# EAGLE board MM-Qwiic-Carrier-2x1-Panel-Panel (EAGLE 9.6.2), part 1 of 3
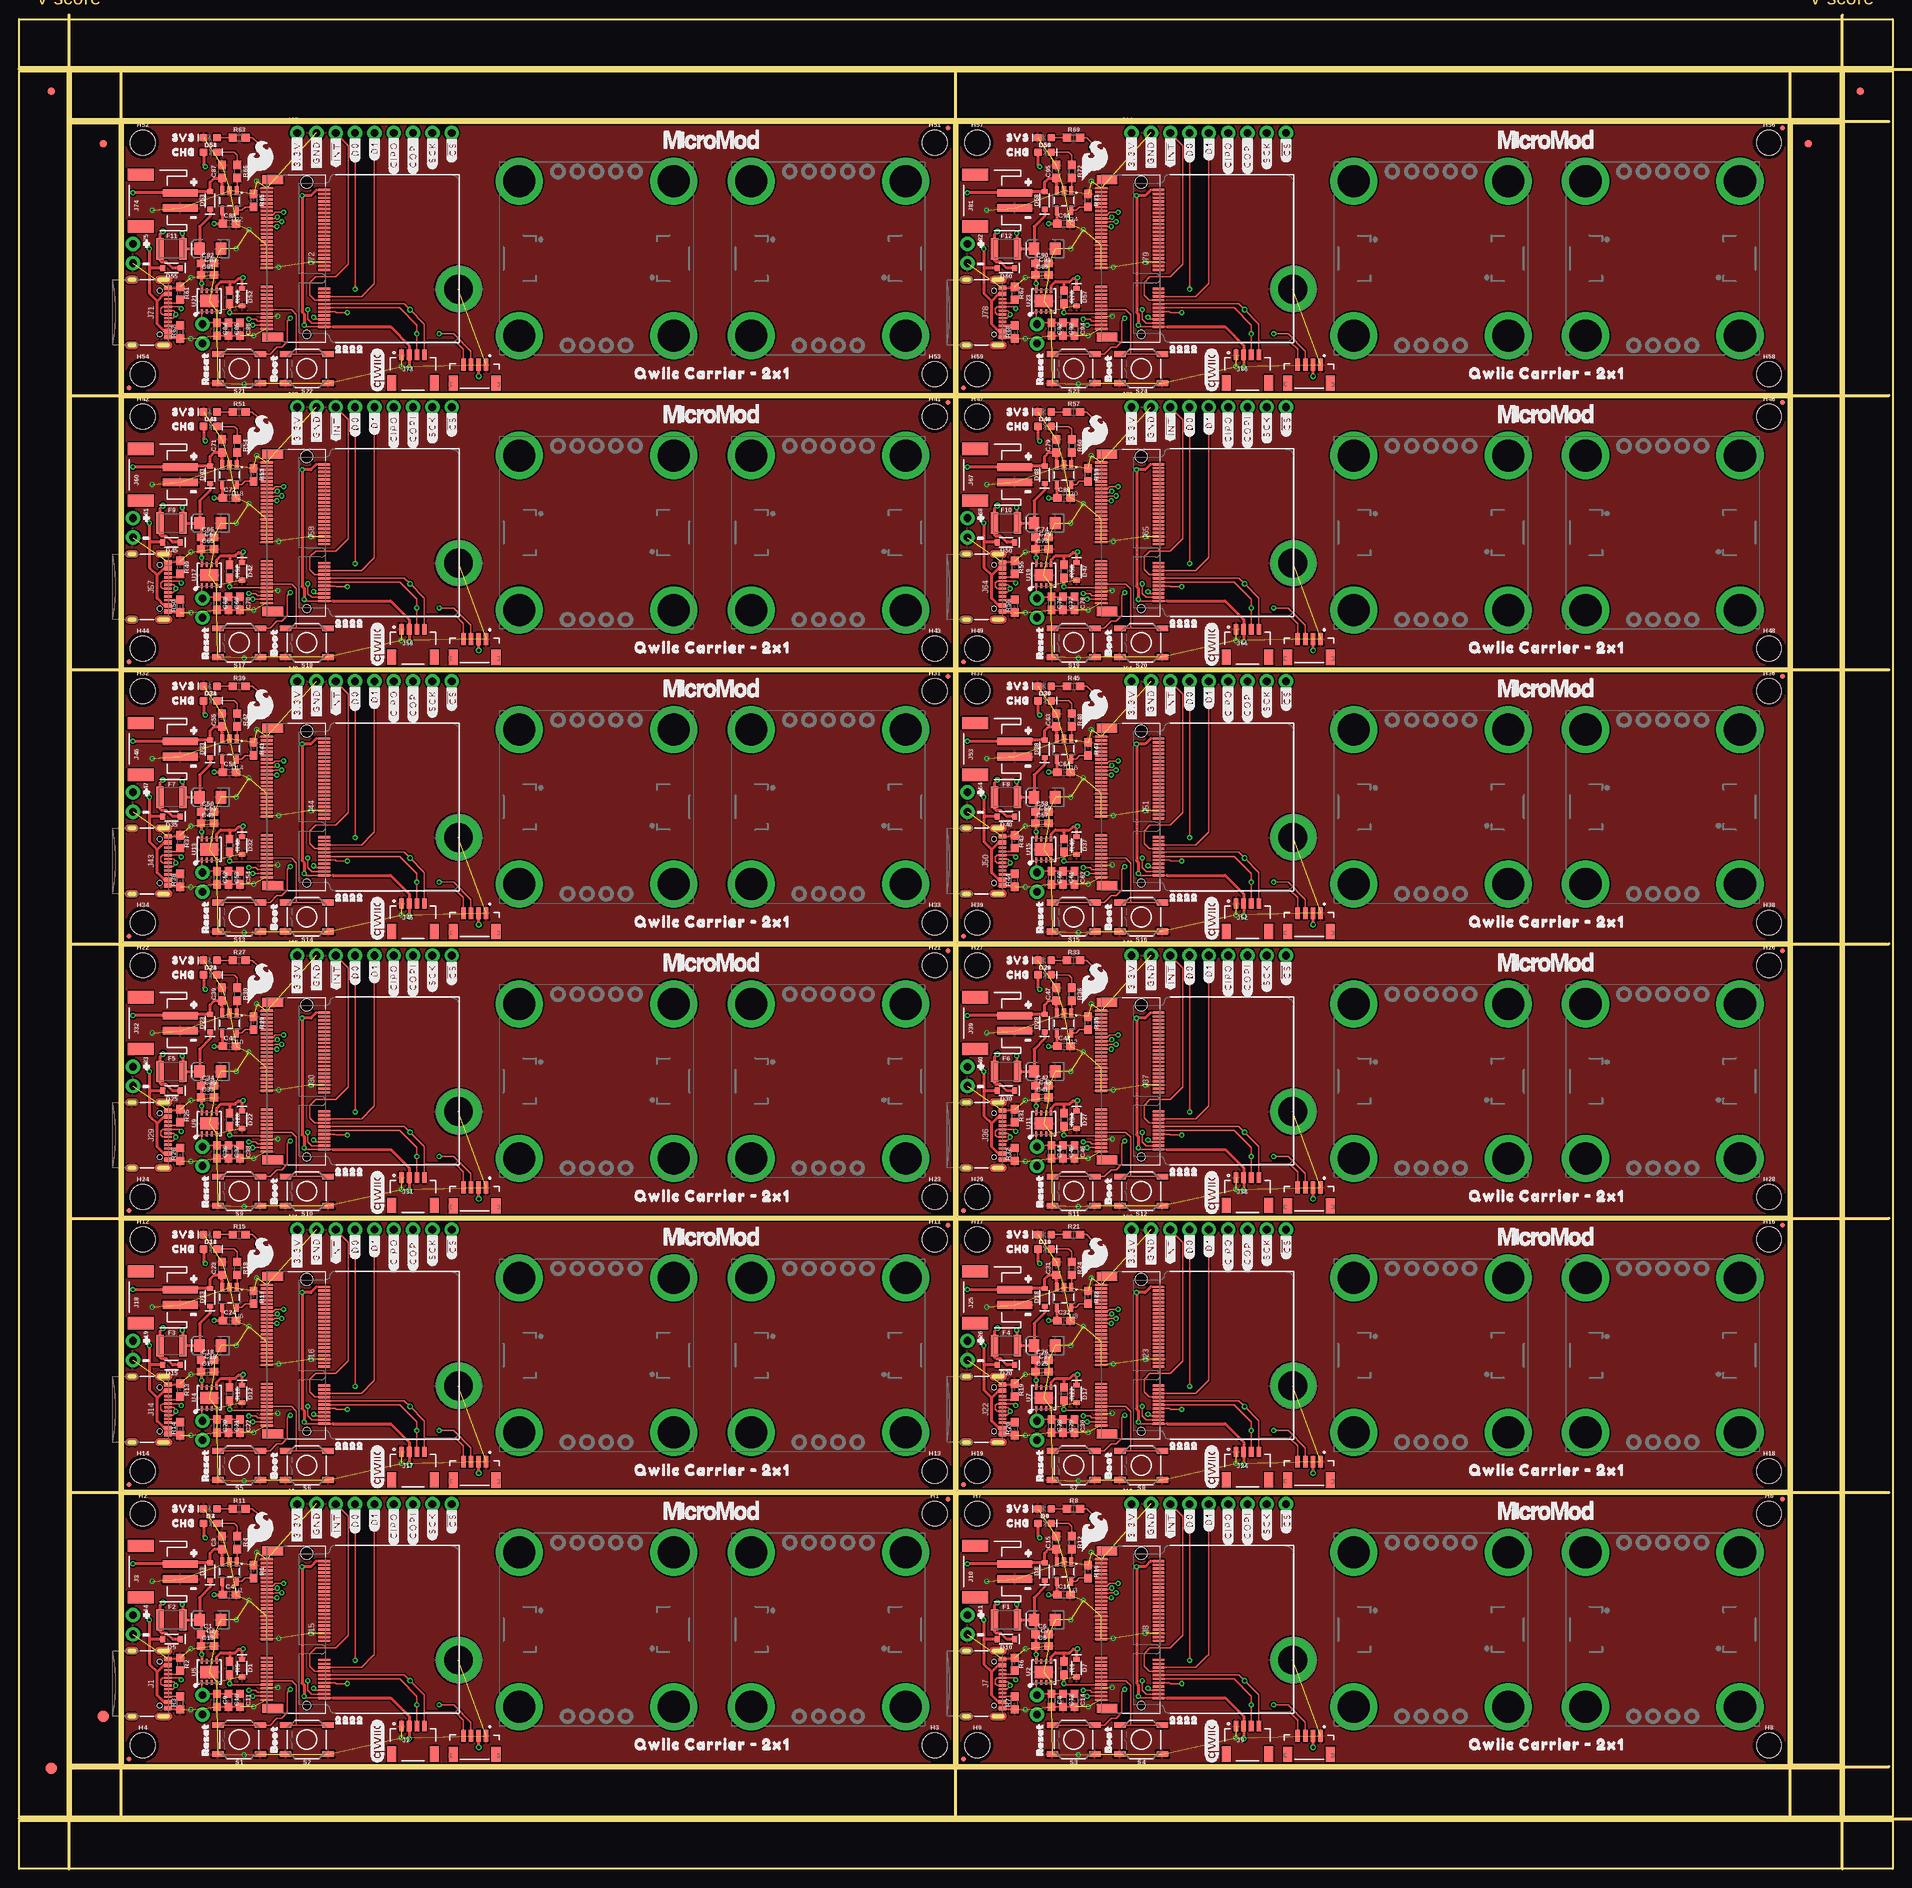
[diagram p0: board, top side]
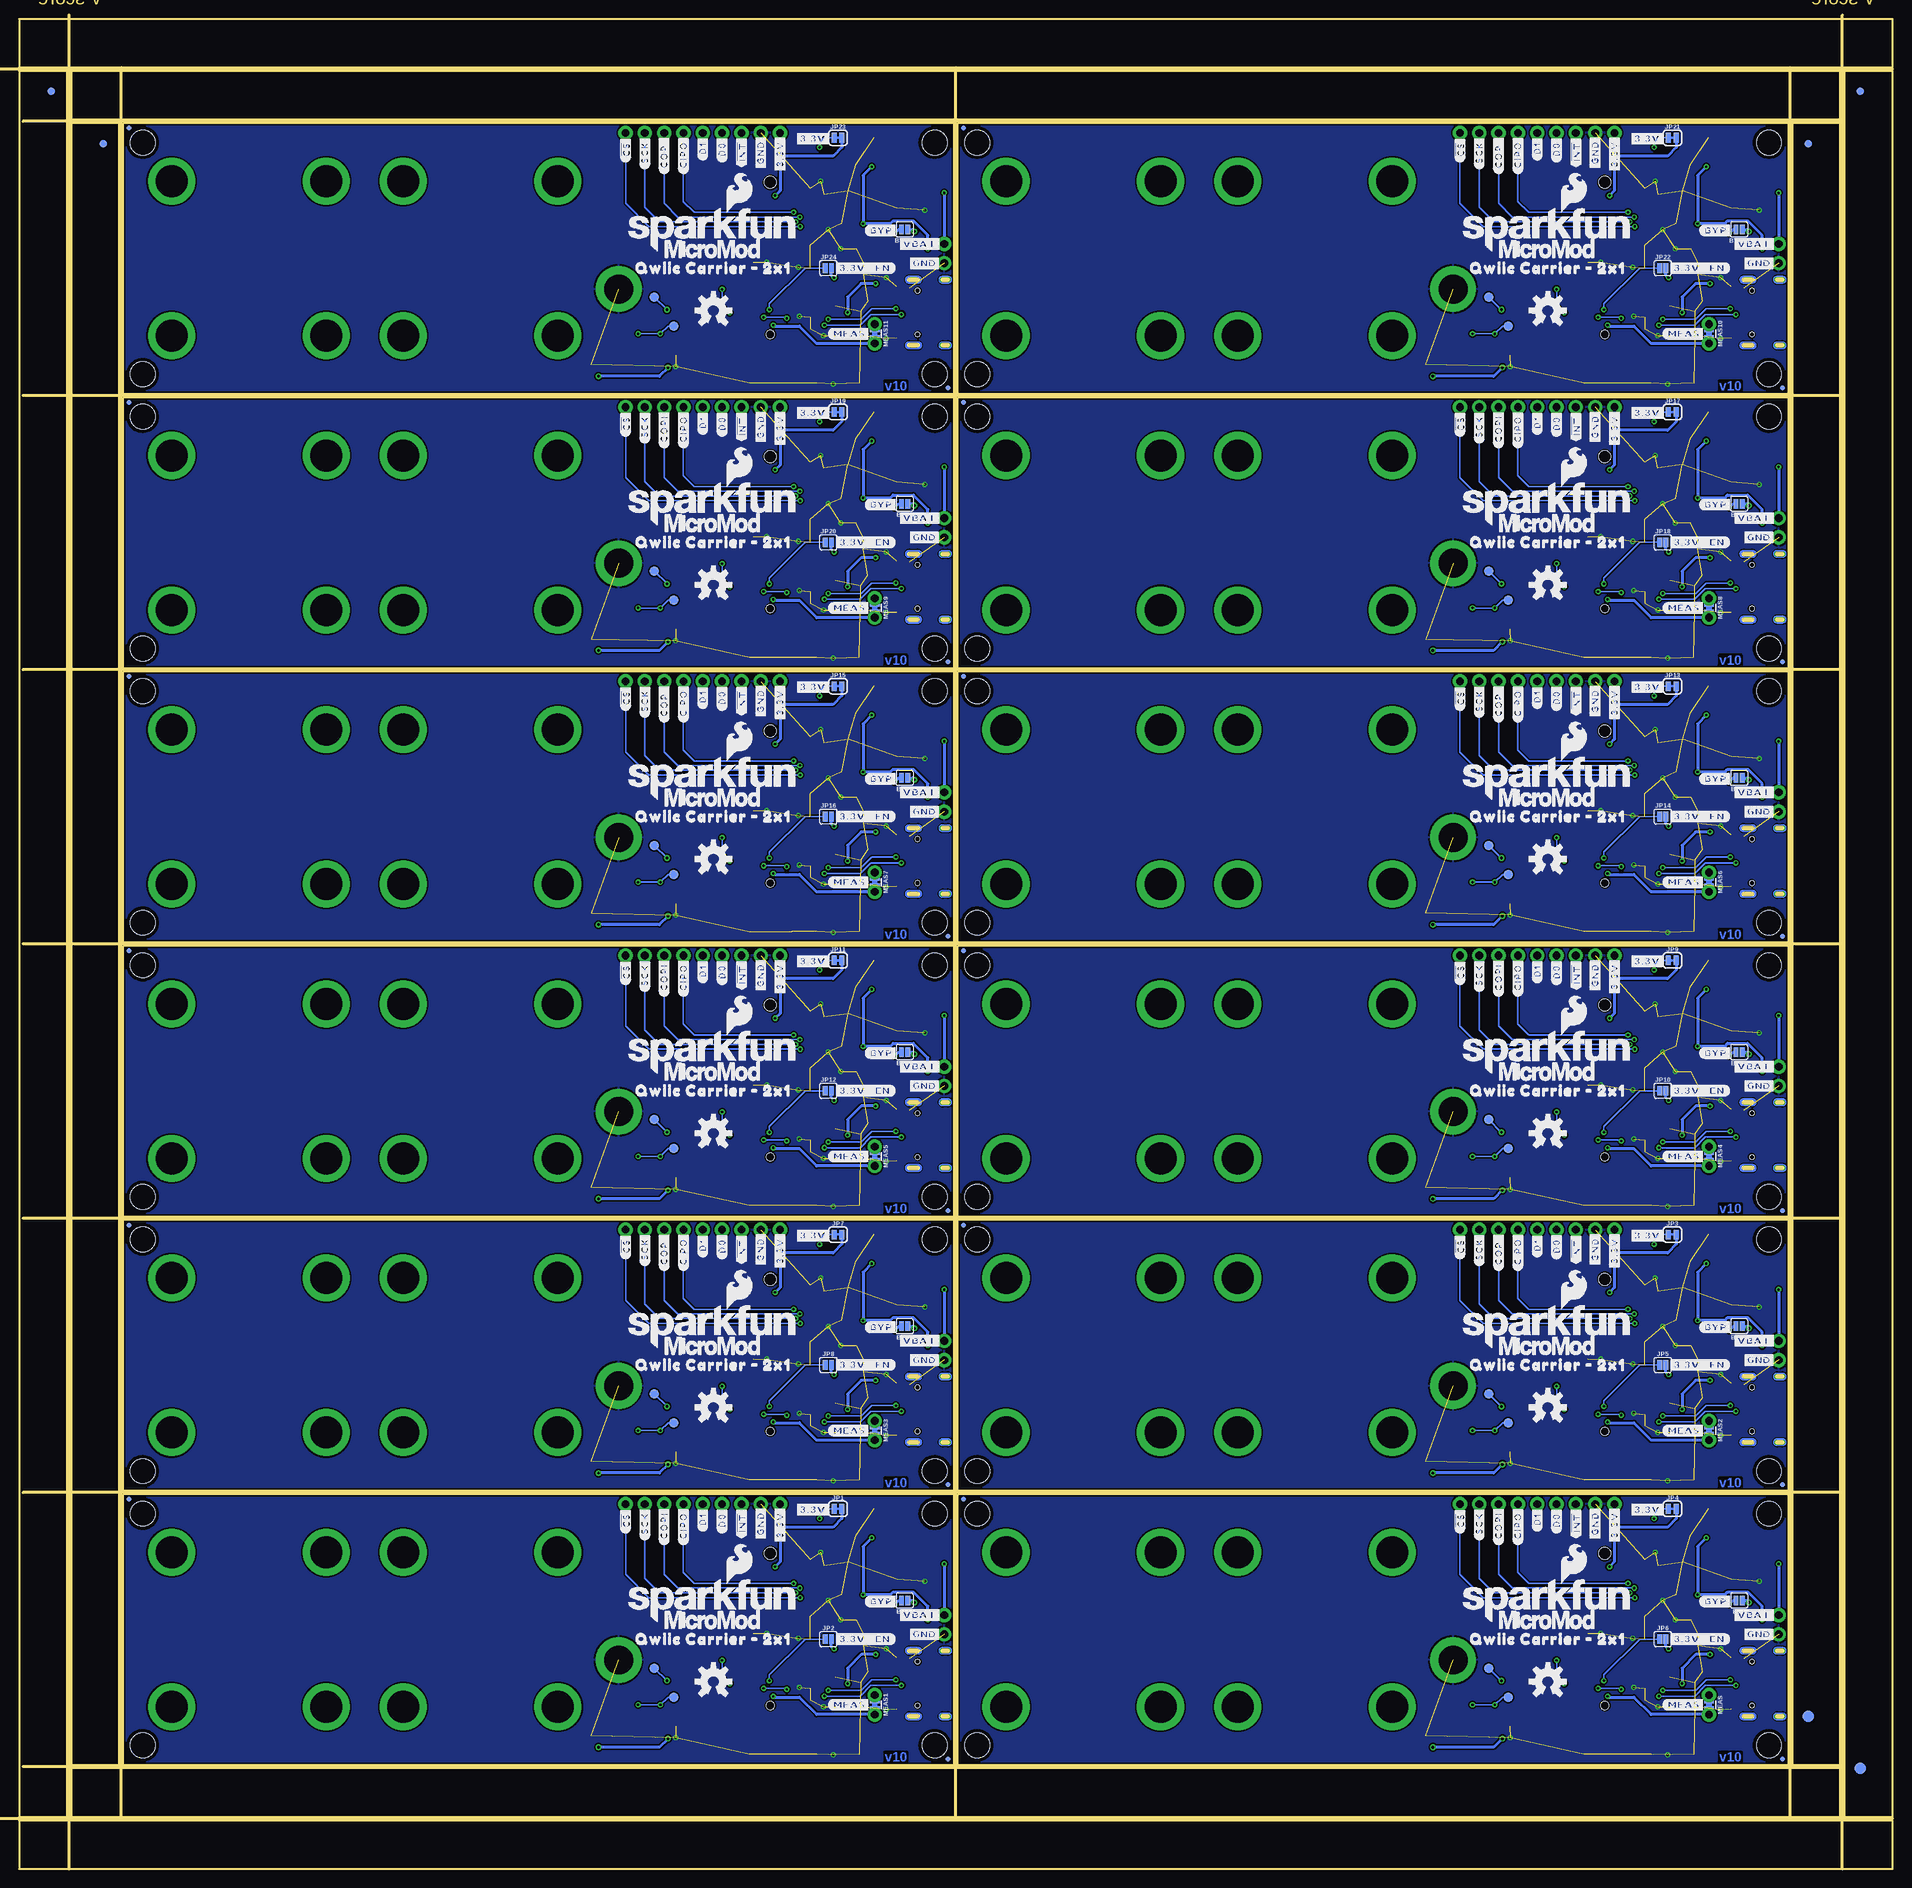
[diagram p1: board, bottom side, seen from below]

Size 246.38 x 243.33 mm. Coordinates in mm from the lower left corner, seen from the top.
Outline: 13.72,13.72 13.72,49.28 122.94,49.28 122.94,13.72 13.72,13.72
Outline: 123.44,13.72 123.44,49.28 232.66,49.28 232.66,13.72 123.44,13.72
Outline: 13.72,49.78 13.72,85.34 122.94,85.34 122.94,49.78 13.72,49.78
Outline: 123.44,49.78 123.44,85.34 232.66,85.34 232.66,49.78 123.44,49.78
Outline: 13.72,85.85 13.72,121.41 122.94,121.41 122.94,85.85 13.72,85.85
Outline: 123.44,85.85 123.44,121.41 232.66,121.41 232.66,85.85 123.44,85.85
Outline: 13.72,121.92 13.72,157.48 122.94,157.48 122.94,121.92 13.72,121.92
Outline: 123.44,121.92 123.44,157.48 232.66,157.48 232.66,121.92 123.44,121.92
Outline: 13.72,157.99 13.72,193.55 122.94,193.55 122.94,157.99 13.72,157.99
Outline: 123.44,157.99 123.44,193.55 232.66,193.55 232.66,157.99 123.44,157.99
Outline: 13.72,194.06 13.72,229.62 122.94,229.62 122.94,194.06 13.72,194.06
Outline: 123.44,194.06 123.44,229.62 232.66,229.62 232.66,194.06 123.44,194.06
Outline: 6.86,13.21 239.52,13.21 239.52,6.86 6.86,6.86 6.86,13.21
Outline: 233.17,229.62 239.52,229.62 239.52,13.72 233.17,13.72 233.17,229.62
Outline: 6.86,236.47 239.52,236.47 239.52,230.12 6.86,230.12 6.86,236.47
Outline: 6.86,229.62 13.21,229.62 13.21,13.72 6.86,13.72 6.86,229.62
Outline: 0,6.35 246.38,6.35 246.38,0 0,0 0,6.35
Outline: 240.03,236.47 246.38,236.47 246.38,6.86 240.03,6.86 240.03,236.47
Outline: 0,243.33 246.38,243.33 246.38,236.98 0,236.98 0,243.33
Outline: 0,236.47 6.35,236.47 6.35,6.86 0,6.86 0,236.47
Copper layers (1*16): Top 0.035mm / dielectric 1.5mm / Bottom 0.035mm
Design rules "MM-Qwiic-Carrier-2x1-Panel": minimum track width 7mil, minimum drill 12mil, track to track 7mil, track to pad 7mil, pad to pad 7mil, via to via 7mil, smd to smd 7mil, copper to edge 7mil, drill to drill 7mil, minimum pad ring 7mil, minimum via ring 7mil, stop-mask expansion 4mil, vias tented up to drill 25mil, thermal gap 10mil
Net classes: 0 default: width 0 mm, drill 0 mm
Milling: 14 lines

## Footprints (pad centres in the part's own frame; a part is rotated, then mirrored left to right if it is on the bottom)
SMT-JUMPER_2_NO_SILK = smd 0.635 x 1.27: 1 -0.406,0; 2 0.406,0
0603 = smd 1.1 x 1: 1 -0.85,0; 2 0.85,0
EIA3216 = smd 1.4 x 1.6: + 1.4,0; - -1.4,0
SOD-323 = smd 0.63 x 0.83: A 1.15,0; C -1.15,0
LED-0603 = smd 1 x 1: A -0.877,0; C 0.877,0
FIDUCIAL-1X2 = smd 1 x 1: 1 0,0
FIDUCIAL-1.5X3 = smd 1.5 x 1.5: 1 0,0
1210 = smd 1 x 2.8: 1 -1.5,0; 2 1.5,0
FIDUCIAL-MICRO = smd 0.635 x 0.635: 1 0,0
STAND-OFF = hole 3.302: 0,0
STAND-OFF-REFLOW-M2.5 = drill 3.8 pad 6: 1 0,0
USB-C-16P-2LAYER-PADS = smd 0.3 x 1: A5 -1.25,-0.34; A6 -0.25,-0.34; A7 0.25,-0.34; A8 1.25,-0.34; B5 1.75,-0.34; B6 0.75,-0.34; B7 -0.75,-0.34; B8 -1.75,-0.34 | smd 0.6 x 1: GND -3.225,-0.34; GND2 3.225,-0.34; VBUS1 -2.45,-0.34; VBUS2 2.45,-0.34 | drill 0.4 pad 0.6 long: SHLD1 -4.318,-0.915; SHLD2 4.318,-0.915; SHLD3 -4.318,-5.095; SHLD4 4.318,-5.095 | hole 0.65: -2.89,-1.445; 2.89,-1.445
JST04_1MM_RA = smd 0.6 x 1.35: 1 -1.5,0; 2 -0.5,0; 3 0.5,0; 4 1.5,0 | smd 1.2 x 2: NC1 2.8,-3.675; NC2 -2.8,-3.675
JST-2-SMD = smd 1 x 4.6: 1 -1,-3.7; 2 1,-3.7 | smd 1.6 x 3.4: NC1 -3.4,1.5; NC2 3.4,1.5
1X02_NO_SILK = drill 1.016 pad 1.88: 1 0,0; 2 2.54,0
JST04_1MM_VERT = smd 0.6 x 1.55: 1 -1.478,0.775; 2 -0.478,0.775; 3 0.522,0.775; 4 1.522,0.775 | smd 1.2 x 2: NC1 -2.778,3.2; NC2 2.822,3.2
1X09_NO_SILK = drill 1.016 pad 1.88: 1 0,0; 2 2.54,0; 3 5.08,0; 4 7.62,0; 5 10.16,0; 6 12.7,0; 7 15.24,0; 8 17.78,0; 9 20.32,0
M.2-CONNECTOR-E = smd 0.3 x 1.55: 1 9.25,-5.275; 2 9,2.275; 3 8.75,-5.275; 4 8.5,2.275; 5 8.25,-5.275; 6 8,2.275; 7 7.75,-5.275; 8 7.5,2.275; 9 7.25,-5.275; 10 7,2.275; 11 6.75,-5.275; 12 6.5,2.275; 13 6.25,-5.275; 14 6,2.275; 15 5.75,-5.275; 16 5.5,2.275; 17 5.25,-5.275; 18 5,2.275; 19 4.75,-5.275; 20 4.5,2.275; 21 4.25,-5.275; 22 4,2.275; 23 3.75,-5.275; 32 1.5,2.275; 33 1.25,-5.275; 34 1,2.275; 35 0.75,-5.275; 36 0.5,2.275; 37 0.25,-5.275; 38 0,2.275; 39 -0.25,-5.275; 40 -0.5,2.275; 41 -0.75,-5.275; 42 -1,2.275; 43 -1.25,-5.275; 44 -1.5,2.275; 45 -1.75,-5.275; 46 -2,2.275; 47 -2.25,-5.275; 48 -2.5,2.275; 49 -2.75,-5.275; 50 -3,2.275; 51 -3.25,-5.275; 52 -3.5,2.275; 53 -3.75,-5.275; 54 -4,2.275; 55 -4.25,-5.275; 56 -4.5,2.275; 57 -4.75,-5.275; 58 -5,2.275; 59 -5.25,-5.275; 60 -5.5,2.275; 61 -5.75,-5.275; 62 -6,2.275; 63 -6.25,-5.275; 64 -6.5,2.275; 65 -6.75,-5.275; 66 -7,2.275; 67 -7.25,-5.275; 68 -7.5,2.275; 69 -7.75,-5.275; 70 -8,2.275; 71 -8.25,-5.275; 72 -8.5,2.275; 73 -8.75,-5.275; 74 -9,2.275; 75 -9.25,-5.275 | smd 1.2 x 2.75: A1 10.35,-4.5; A2 -10.35,-4.5 | hole 1.1: 10,0 | hole 1.6: -10,0
SMT-JUMPER_2_NC_TRACE_SILK = smd 0.66 x 1.27: 1 -0.521,0; 2 0.521,0
COMBO-JUMPER_2_NC_TRACE = smd 0.635 x 1.27: 1 -0.508,0; 2 0.508,0 | drill 1.016 pad 1.88: 3 -1.27,0; 4 1.27,0
TACTILE_SWITCH_SMD_5.2MM = smd 1.524 x 0.762: 1 -2.794,1.905; 2 2.794,1.905; 3 -2.794,-1.905; 4 2.794,-1.905
PAD.03X.05 = smd 1.27 x 1.27: P$1 0,0
SOT23-5 = smd 0.55 x 1.2: 1 -0.95,-1.3; 2 0,-1.3; 3 0.95,-1.3; 4 0.95,1.3; 5 -0.95,1.3
UDFN-8 = smd 0.3 x 0.65: 1 -0.975,-1.375; 2 -0.325,-1.375; 3 0.325,-1.375; 4 0.975,-1.375; 5 0.975,1.375; 6 0.325,1.375; 7 -0.325,1.375; 8 -0.975,1.375 | smd 2.35 x 1.6: EP 0,0
QWIIC_BOARD_MOUNT_SMD_STANDOFFS = drill 4.216 pad 6.198: 1 -10.16,10.16; 2 10.16,10.16; 3 -10.16,-10.16; 4 10.16,-10.16

## Placement (x,y rotation side)
BYP  JUMPER-SMT_2_NO_SILK  [SMT-JUMPER_2_NO_SILK]  20.19,35.31 180 bottom
BYP1  JUMPER-SMT_2_NO_SILK  [SMT-JUMPER_2_NO_SILK]  129.92,35.31 180 bottom
BYP2  JUMPER-SMT_2_NO_SILK  [SMT-JUMPER_2_NO_SILK]  20.19,71.37 180 bottom
BYP3  JUMPER-SMT_2_NO_SILK  [SMT-JUMPER_2_NO_SILK]  129.92,71.37 180 bottom
BYP4  JUMPER-SMT_2_NO_SILK  [SMT-JUMPER_2_NO_SILK]  20.19,107.44 180 bottom
BYP5  JUMPER-SMT_2_NO_SILK  [SMT-JUMPER_2_NO_SILK]  129.92,107.44 180 bottom
BYP6  JUMPER-SMT_2_NO_SILK  [SMT-JUMPER_2_NO_SILK]  20.19,143.51 180 bottom
BYP7  JUMPER-SMT_2_NO_SILK  [SMT-JUMPER_2_NO_SILK]  129.92,143.51 180 bottom
BYP8  JUMPER-SMT_2_NO_SILK  [SMT-JUMPER_2_NO_SILK]  20.19,179.58 180 bottom
BYP9  JUMPER-SMT_2_NO_SILK  [SMT-JUMPER_2_NO_SILK]  129.92,179.58 180 bottom
BYP10  JUMPER-SMT_2_NO_SILK  [SMT-JUMPER_2_NO_SILK]  20.19,215.65 180 bottom
BYP11  JUMPER-SMT_2_NO_SILK  [SMT-JUMPER_2_NO_SILK]  129.92,215.65 180 bottom
C1  0.1uF  [0603]  24.8,30.86 0 top
C2  10uF  [EIA3216]  25.15,32.77 180 top
C3  4.7uF  [0603]  26.67,42.93 90 top
C4  4.7uF  [0603]  27.69,36.07 0 top
C5  0.22uF  [0603]  134.53,29.34 0 top
C6  0.1uF  [0603]  134.53,30.86 0 top
C7  10uF  [EIA3216]  134.87,32.77 180 top
C8  10uF  [0603]  135.76,22.19 270 top
C9  10uF  [0603]  26.04,22.19 270 top
C10  1.0uF  [0603]  27.56,22.19 270 top
C11  0.22uF  [0603]  29.08,22.19 270 top
C12  1.0uF  [0603]  137.29,22.19 270 top
C13  0.22uF  [0603]  24.8,29.34 0 top
C14  0.22uF  [0603]  138.81,22.19 270 top
C15  4.7uF  [0603]  136.4,42.93 90 top
C16  4.7uF  [0603]  137.41,36.07 0 top
C17  0.22uF  [0603]  24.8,65.41 0 top
C18  0.1uF  [0603]  24.8,66.93 0 top
C19  10uF  [EIA3216]  25.15,68.83 180 top
C20  10uF  [0603]  26.04,58.25 270 top
C21  1.0uF  [0603]  27.56,58.25 270 top
C22  0.22uF  [0603]  29.08,58.25 270 top
C23  4.7uF  [0603]  26.67,78.99 90 top
C24  4.7uF  [0603]  27.69,72.14 0 top
C25  0.22uF  [0603]  134.53,65.41 0 top
C26  0.1uF  [0603]  134.53,66.93 0 top
C27  10uF  [EIA3216]  134.87,68.83 180 top
C28  10uF  [0603]  135.76,58.25 270 top
C29  1.0uF  [0603]  137.29,58.25 270 top
C30  0.22uF  [0603]  138.81,58.25 270 top
C31  4.7uF  [0603]  136.4,78.99 90 top
C32  4.7uF  [0603]  137.41,72.14 0 top
C33  0.22uF  [0603]  24.8,101.47 0 top
C34  0.1uF  [0603]  24.8,103 0 top
C35  10uF  [EIA3216]  25.15,104.9 180 top
C36  10uF  [0603]  26.04,94.32 270 top
C37  1.0uF  [0603]  27.56,94.32 270 top
C38  0.22uF  [0603]  29.08,94.32 270 top
C39  4.7uF  [0603]  26.67,115.06 90 top
C40  4.7uF  [0603]  27.69,108.2 0 top
C41  0.22uF  [0603]  134.53,101.47 0 top
C42  0.1uF  [0603]  134.53,103 0 top
C43  10uF  [EIA3216]  134.87,104.9 180 top
C44  10uF  [0603]  135.76,94.32 270 top
C45  1.0uF  [0603]  137.29,94.32 270 top
C46  0.22uF  [0603]  138.81,94.32 270 top
C47  4.7uF  [0603]  136.4,115.06 90 top
C48  4.7uF  [0603]  137.41,108.2 0 top
C49  0.22uF  [0603]  24.8,137.54 0 top
C50  0.1uF  [0603]  24.8,139.06 0 top
C51  10uF  [EIA3216]  25.15,140.97 180 top
C52  10uF  [0603]  26.04,130.39 270 top
C53  1.0uF  [0603]  27.56,130.39 270 top
C54  0.22uF  [0603]  29.08,130.39 270 top
C55  4.7uF  [0603]  26.67,151.13 90 top
C56  4.7uF  [0603]  27.69,144.27 0 top
C57  0.22uF  [0603]  134.53,137.54 0 top
C58  0.1uF  [0603]  134.53,139.06 0 top
C59  10uF  [EIA3216]  134.87,140.97 180 top
C60  10uF  [0603]  135.76,130.39 270 top
C61  1.0uF  [0603]  137.29,130.39 270 top
C62  0.22uF  [0603]  138.81,130.39 270 top
C63  4.7uF  [0603]  136.4,151.13 90 top
C64  4.7uF  [0603]  137.41,144.27 0 top
C65  0.22uF  [0603]  24.8,173.61 0 top
C66  0.1uF  [0603]  24.8,175.13 0 top
C67  10uF  [EIA3216]  25.15,177.04 180 top
C68  10uF  [0603]  26.04,166.46 270 top
C69  1.0uF  [0603]  27.56,166.46 270 top
C70  0.22uF  [0603]  29.08,166.46 270 top
C71  4.7uF  [0603]  26.67,187.2 90 top
C72  4.7uF  [0603]  27.69,180.34 0 top
C73  0.22uF  [0603]  134.53,173.61 0 top
C74  0.1uF  [0603]  134.53,175.13 0 top
C75  10uF  [EIA3216]  134.87,177.04 180 top
C76  10uF  [0603]  135.76,166.46 270 top
C77  1.0uF  [0603]  137.29,166.46 270 top
C78  0.22uF  [0603]  138.81,166.46 270 top
C79  4.7uF  [0603]  136.4,187.2 90 top
C80  4.7uF  [0603]  137.41,180.34 0 top
C81  0.22uF  [0603]  24.8,209.68 0 top
C82  0.1uF  [0603]  24.8,211.2 0 top
C83  10uF  [EIA3216]  25.15,213.11 180 top
C84  10uF  [0603]  26.04,202.53 270 top
C85  1.0uF  [0603]  27.56,202.53 270 top
C86  0.22uF  [0603]  29.08,202.53 270 top
C87  4.7uF  [0603]  26.67,223.27 90 top
C88  4.7uF  [0603]  27.69,216.41 0 top
C89  0.22uF  [0603]  134.53,209.68 0 top
C90  0.1uF  [0603]  134.53,211.2 0 top
C91  10uF  [EIA3216]  134.87,213.11 180 top
C92  10uF  [0603]  135.76,202.53 270 top
C93  1.0uF  [0603]  137.29,202.53 270 top
C94  0.22uF  [0603]  138.81,202.53 270 top
C95  4.7uF  [0603]  136.4,223.27 90 top
C96  4.7uF  [0603]  137.41,216.41 0 top
D1  3.3V  [SOD-323]  29.34,26.42 270 top
D2  RED  [LED-0603]  25.15,47.37 180 top
D3  3A/10V/280mV  [SOD-323]  25.15,39.12 90 top
D4  Yellow  [LED-0603]  25.15,45.47 0 top
D5  3A/10V/280mV  [SOD-323]  20.07,30.23 180 top
D6  RED  [LED-0603]  134.87,47.37 180 top
D7  3.3V  [SOD-323]  139.06,26.42 270 top
D8  3A/10V/280mV  [SOD-323]  134.87,39.12 90 top
D9  Yellow  [LED-0603]  134.87,45.47 0 top
D10  3A/10V/280mV  [SOD-323]  129.79,30.23 180 top
D11  RED  [LED-0603]  25.15,83.44 180 top
D12  3.3V  [SOD-323]  29.34,62.48 270 top
D13  3A/10V/280mV  [SOD-323]  25.15,75.18 90 top
D14  Yellow  [LED-0603]  25.15,81.53 0 top
D15  3A/10V/280mV  [SOD-323]  20.07,66.29 180 top
D16  RED  [LED-0603]  134.87,83.44 180 top
D17  3.3V  [SOD-323]  139.06,62.48 270 top
D18  3A/10V/280mV  [SOD-323]  134.87,75.18 90 top
D19  Yellow  [LED-0603]  134.87,81.53 0 top
D20  3A/10V/280mV  [SOD-323]  129.79,66.29 180 top
D21  RED  [LED-0603]  25.15,119.51 180 top
D22  3.3V  [SOD-323]  29.34,98.55 270 top
D23  3A/10V/280mV  [SOD-323]  25.15,111.25 90 top
D24  Yellow  [LED-0603]  25.15,117.6 0 top
D25  3A/10V/280mV  [SOD-323]  20.07,102.36 180 top
D26  RED  [LED-0603]  134.87,119.51 180 top
D27  3.3V  [SOD-323]  139.06,98.55 270 top
D28  3A/10V/280mV  [SOD-323]  134.87,111.25 90 top
D29  Yellow  [LED-0603]  134.87,117.6 0 top
D30  3A/10V/280mV  [SOD-323]  129.79,102.36 180 top
D31  RED  [LED-0603]  25.15,155.58 180 top
D32  3.3V  [SOD-323]  29.34,134.62 270 top
D33  3A/10V/280mV  [SOD-323]  25.15,147.32 90 top
D34  Yellow  [LED-0603]  25.15,153.67 0 top
D35  3A/10V/280mV  [SOD-323]  20.07,138.43 180 top
D36  RED  [LED-0603]  134.87,155.58 180 top
D37  3.3V  [SOD-323]  139.06,134.62 270 top
D38  3A/10V/280mV  [SOD-323]  134.87,147.32 90 top
D39  Yellow  [LED-0603]  134.87,153.67 0 top
D40  3A/10V/280mV  [SOD-323]  129.79,138.43 180 top
D41  RED  [LED-0603]  25.15,191.64 180 top
D42  3.3V  [SOD-323]  29.34,170.69 270 top
D43  3A/10V/280mV  [SOD-323]  25.15,183.39 90 top
D44  Yellow  [LED-0603]  25.15,189.74 0 top
D45  3A/10V/280mV  [SOD-323]  20.07,174.5 180 top
D46  RED  [LED-0603]  134.87,191.64 180 top
D47  3.3V  [SOD-323]  139.06,170.69 270 top
D48  3A/10V/280mV  [SOD-323]  134.87,183.39 90 top
D49  Yellow  [LED-0603]  134.87,189.74 0 top
D50  3A/10V/280mV  [SOD-323]  129.79,174.5 180 top
D51  RED  [LED-0603]  25.15,227.71 180 top
D52  3.3V  [SOD-323]  29.34,206.76 270 top
D53  3A/10V/280mV  [SOD-323]  25.15,219.46 90 top
D54  Yellow  [LED-0603]  25.15,225.81 0 top
D55  3A/10V/280mV  [SOD-323]  20.07,210.57 180 top
D56  RED  [LED-0603]  134.87,227.71 180 top
D57  3.3V  [SOD-323]  139.06,206.76 270 top
D58  3A/10V/280mV  [SOD-323]  134.87,219.46 90 top
D59  Yellow  [LED-0603]  134.87,225.81 0 top
D60  3A/10V/280mV  [SOD-323]  129.79,210.57 180 top
E$1  [FIDUCIAL-1X2]  11.09,226.95 0 top
E$2  [FIDUCIAL-1X2]  11.09,226.95 0 bottom
E$3  [FIDUCIAL-1X2]  235.29,226.95 0 top
E$4  [FIDUCIAL-1X2]  235.29,226.95 0 bottom
E$5  [FIDUCIAL-1.5X3]  11.09,20.07 0 top
E$6  [FIDUCIAL-1.5X3]  11.09,20.07 0 bottom
E$7  [FIDUCIAL-1X2]  4.23,233.81 0 top
E$8  [FIDUCIAL-1X2]  4.23,233.81 0 bottom
E$9  [FIDUCIAL-1X2]  242.15,233.81 0 top
E$10  [FIDUCIAL-1X2]  242.15,233.81 0 bottom
E$11  [FIDUCIAL-1.5X3]  4.23,13.21 0 top
E$12  [FIDUCIAL-1.5X3]  4.23,13.21 0 bottom
F1  6V/2A  [1210]  129.79,32.77 0 top
F2  6V/2A  [1210]  20.07,32.77 0 top
F3  6V/2A  [1210]  20.07,68.83 0 top
F4  6V/2A  [1210]  129.79,68.83 0 top
F5  6V/2A  [1210]  20.07,104.9 0 top
F6  6V/2A  [1210]  129.79,104.9 0 top
F7  6V/2A  [1210]  20.07,140.97 0 top
F8  6V/2A  [1210]  129.79,140.97 0 top
F9  6V/2A  [1210]  20.07,177.04 0 top
F10  6V/2A  [1210]  129.79,177.04 0 top
F11  6V/2A  [1210]  20.07,213.11 0 top
F12  6V/2A  [1210]  129.79,213.11 0 top
FD1  FIDUCIALUFIDUCIAL  [FIDUCIAL-MICRO]  14.48,14.48 0 top
FD2  FIDUCIALUFIDUCIAL  [FIDUCIAL-MICRO]  122.17,48.64 0 top
FD3  FIDUCIALUFIDUCIAL  [FIDUCIAL-MICRO]  14.48,14.48 0 bottom
FD4  FIDUCIALUFIDUCIAL  [FIDUCIAL-MICRO]  122.17,48.64 0 bottom
FD5  FIDUCIALUFIDUCIAL  [FIDUCIAL-MICRO]  124.21,14.48 0 top
FD6  FIDUCIALUFIDUCIAL  [FIDUCIAL-MICRO]  231.9,48.64 0 top
FD7  FIDUCIALUFIDUCIAL  [FIDUCIAL-MICRO]  124.21,14.48 0 bottom
FD8  FIDUCIALUFIDUCIAL  [FIDUCIAL-MICRO]  231.9,48.64 0 bottom
FD9  FIDUCIALUFIDUCIAL  [FIDUCIAL-MICRO]  14.48,50.55 0 top
FD10  FIDUCIALUFIDUCIAL  [FIDUCIAL-MICRO]  122.17,84.71 0 top
FD11  FIDUCIALUFIDUCIAL  [FIDUCIAL-MICRO]  14.48,50.55 0 bottom
FD12  FIDUCIALUFIDUCIAL  [FIDUCIAL-MICRO]  122.17,84.71 0 bottom
FD13  FIDUCIALUFIDUCIAL  [FIDUCIAL-MICRO]  124.21,50.55 0 top
FD14  FIDUCIALUFIDUCIAL  [FIDUCIAL-MICRO]  231.9,84.71 0 top
FD15  FIDUCIALUFIDUCIAL  [FIDUCIAL-MICRO]  124.21,50.55 0 bottom
FD16  FIDUCIALUFIDUCIAL  [FIDUCIAL-MICRO]  231.9,84.71 0 bottom
FD17  FIDUCIALUFIDUCIAL  [FIDUCIAL-MICRO]  14.48,86.61 0 top
FD18  FIDUCIALUFIDUCIAL  [FIDUCIAL-MICRO]  122.17,120.78 0 top
FD19  FIDUCIALUFIDUCIAL  [FIDUCIAL-MICRO]  14.48,86.61 0 bottom
FD20  FIDUCIALUFIDUCIAL  [FIDUCIAL-MICRO]  122.17,120.78 0 bottom
FD21  FIDUCIALUFIDUCIAL  [FIDUCIAL-MICRO]  124.21,86.61 0 top
FD22  FIDUCIALUFIDUCIAL  [FIDUCIAL-MICRO]  231.9,120.78 0 top
FD23  FIDUCIALUFIDUCIAL  [FIDUCIAL-MICRO]  124.21,86.61 0 bottom
FD24  FIDUCIALUFIDUCIAL  [FIDUCIAL-MICRO]  231.9,120.78 0 bottom
FD25  FIDUCIALUFIDUCIAL  [FIDUCIAL-MICRO]  14.48,122.68 0 top
FD26  FIDUCIALUFIDUCIAL  [FIDUCIAL-MICRO]  122.17,156.84 0 top
FD27  FIDUCIALUFIDUCIAL  [FIDUCIAL-MICRO]  14.48,122.68 0 bottom
FD28  FIDUCIALUFIDUCIAL  [FIDUCIAL-MICRO]  122.17,156.84 0 bottom
FD29  FIDUCIALUFIDUCIAL  [FIDUCIAL-MICRO]  124.21,122.68 0 top
FD30  FIDUCIALUFIDUCIAL  [FIDUCIAL-MICRO]  231.9,156.84 0 top
FD31  FIDUCIALUFIDUCIAL  [FIDUCIAL-MICRO]  124.21,122.68 0 bottom
FD32  FIDUCIALUFIDUCIAL  [FIDUCIAL-MICRO]  231.9,156.84 0 bottom
FD33  FIDUCIALUFIDUCIAL  [FIDUCIAL-MICRO]  14.48,158.75 0 top
FD34  FIDUCIALUFIDUCIAL  [FIDUCIAL-MICRO]  122.17,192.91 0 top
FD35  FIDUCIALUFIDUCIAL  [FIDUCIAL-MICRO]  14.48,158.75 0 bottom
FD36  FIDUCIALUFIDUCIAL  [FIDUCIAL-MICRO]  122.17,192.91 0 bottom
FD37  FIDUCIALUFIDUCIAL  [FIDUCIAL-MICRO]  124.21,158.75 0 top
FD38  FIDUCIALUFIDUCIAL  [FIDUCIAL-MICRO]  231.9,192.91 0 top
FD39  FIDUCIALUFIDUCIAL  [FIDUCIAL-MICRO]  124.21,158.75 0 bottom
FD40  FIDUCIALUFIDUCIAL  [FIDUCIAL-MICRO]  231.9,192.91 0 bottom
FD41  FIDUCIALUFIDUCIAL  [FIDUCIAL-MICRO]  14.48,194.82 0 top
FD42  FIDUCIALUFIDUCIAL  [FIDUCIAL-MICRO]  122.17,228.98 0 top
FD43  FIDUCIALUFIDUCIAL  [FIDUCIAL-MICRO]  14.48,194.82 0 bottom
FD44  FIDUCIALUFIDUCIAL  [FIDUCIAL-MICRO]  122.17,228.98 0 bottom
FD45  FIDUCIALUFIDUCIAL  [FIDUCIAL-MICRO]  124.21,194.82 0 top
FD46  FIDUCIALUFIDUCIAL  [FIDUCIAL-MICRO]  231.9,228.98 0 top
FD47  FIDUCIALUFIDUCIAL  [FIDUCIAL-MICRO]  124.21,194.82 0 bottom
FD48  FIDUCIALUFIDUCIAL  [FIDUCIAL-MICRO]  231.9,228.98 0 bottom
H1  STAND-OFF  [STAND-OFF]  120.4,46.74 0 top
H2  STAND-OFF  [STAND-OFF]  16.26,46.74 0 top
H3  STAND-OFF  [STAND-OFF]  120.4,16.26 0 top
H4  STAND-OFF  [STAND-OFF]  16.26,16.26 0 top
H5  STAND-OFF-REFLOW2.5MM_TALL  [STAND-OFF-REFLOW-M2.5]  57.79,27.48 0 top
H6  STAND-OFF  [STAND-OFF]  230.12,46.74 0 top
H7  STAND-OFF  [STAND-OFF]  125.98,46.74 0 top
H8  STAND-OFF  [STAND-OFF]  230.12,16.26 0 top
H9  STAND-OFF  [STAND-OFF]  125.98,16.26 0 top
H10  STAND-OFF-REFLOW2.5MM_TALL  [STAND-OFF-REFLOW-M2.5]  167.52,27.48 0 top
H11  STAND-OFF  [STAND-OFF]  120.4,82.8 0 top
H12  STAND-OFF  [STAND-OFF]  16.26,82.8 0 top
H13  STAND-OFF  [STAND-OFF]  120.4,52.32 0 top
H14  STAND-OFF  [STAND-OFF]  16.26,52.32 0 top
H15  STAND-OFF-REFLOW2.5MM_TALL  [STAND-OFF-REFLOW-M2.5]  57.79,63.54 0 top
H16  STAND-OFF  [STAND-OFF]  230.12,82.8 0 top
H17  STAND-OFF  [STAND-OFF]  125.98,82.8 0 top
H18  STAND-OFF  [STAND-OFF]  230.12,52.32 0 top
H19  STAND-OFF  [STAND-OFF]  125.98,52.32 0 top
H20  STAND-OFF-REFLOW2.5MM_TALL  [STAND-OFF-REFLOW-M2.5]  167.52,63.54 0 top
H21  STAND-OFF  [STAND-OFF]  120.4,118.87 0 top
H22  STAND-OFF  [STAND-OFF]  16.26,118.87 0 top
H23  STAND-OFF  [STAND-OFF]  120.4,88.39 0 top
H24  STAND-OFF  [STAND-OFF]  16.26,88.39 0 top
H25  STAND-OFF-REFLOW2.5MM_TALL  [STAND-OFF-REFLOW-M2.5]  57.79,99.61 0 top
H26  STAND-OFF  [STAND-OFF]  230.12,118.87 0 top
H27  STAND-OFF  [STAND-OFF]  125.98,118.87 0 top
H28  STAND-OFF  [STAND-OFF]  230.12,88.39 0 top
H29  STAND-OFF  [STAND-OFF]  125.98,88.39 0 top
H30  STAND-OFF-REFLOW2.5MM_TALL  [STAND-OFF-REFLOW-M2.5]  167.52,99.61 0 top
H31  STAND-OFF  [STAND-OFF]  120.4,154.94 0 top
H32  STAND-OFF  [STAND-OFF]  16.26,154.94 0 top
H33  STAND-OFF  [STAND-OFF]  120.4,124.46 0 top
H34  STAND-OFF  [STAND-OFF]  16.26,124.46 0 top
H35  STAND-OFF-REFLOW2.5MM_TALL  [STAND-OFF-REFLOW-M2.5]  57.79,135.68 0 top
H36  STAND-OFF  [STAND-OFF]  230.12,154.94 0 top
H37  STAND-OFF  [STAND-OFF]  125.98,154.94 0 top
H38  STAND-OFF  [STAND-OFF]  230.12,124.46 0 top
H39  STAND-OFF  [STAND-OFF]  125.98,124.46 0 top
H40  STAND-OFF-REFLOW2.5MM_TALL  [STAND-OFF-REFLOW-M2.5]  167.52,135.68 0 top
H41  STAND-OFF  [STAND-OFF]  120.4,191.01 0 top
H42  STAND-OFF  [STAND-OFF]  16.26,191.01 0 top
H43  STAND-OFF  [STAND-OFF]  120.4,160.53 0 top
H44  STAND-OFF  [STAND-OFF]  16.26,160.53 0 top
H45  STAND-OFF-REFLOW2.5MM_TALL  [STAND-OFF-REFLOW-M2.5]  57.79,171.75 0 top
H46  STAND-OFF  [STAND-OFF]  230.12,191.01 0 top
H47  STAND-OFF  [STAND-OFF]  125.98,191.01 0 top
H48  STAND-OFF  [STAND-OFF]  230.12,160.53 0 top
H49  STAND-OFF  [STAND-OFF]  125.98,160.53 0 top
H50  STAND-OFF-REFLOW2.5MM_TALL  [STAND-OFF-REFLOW-M2.5]  167.52,171.75 0 top
H51  STAND-OFF  [STAND-OFF]  120.4,227.08 0 top
H52  STAND-OFF  [STAND-OFF]  16.26,227.08 0 top
H53  STAND-OFF  [STAND-OFF]  120.4,196.6 0 top
H54  STAND-OFF  [STAND-OFF]  16.26,196.6 0 top
H55  STAND-OFF-REFLOW2.5MM_TALL  [STAND-OFF-REFLOW-M2.5]  57.79,207.82 0 top
H56  STAND-OFF  [STAND-OFF]  230.12,227.08 0 top
H57  STAND-OFF  [STAND-OFF]  125.98,227.08 0 top
H58  STAND-OFF  [STAND-OFF]  230.12,196.6 0 top
H59  STAND-OFF  [STAND-OFF]  125.98,196.6 0 top
H60  STAND-OFF-REFLOW2.5MM_TALL  [STAND-OFF-REFLOW-M2.5]  167.52,207.82 0 top
J1  [USB-C-16P-2LAYER-PADS]  19.94,24.38 270 top
J2  QWIIC_RIGHT_ANGLE  [JST04_1MM_RA]  51.82,18.8 0 top
J3  [JST-2-SMD]  17.53,39.12 90 top
J4  [1X02_NO_SILK]  14.99,33.4 270 top
J5  Vertical Qwiic Connector  [JST04_1MM_VERT]  59.94,18.29 180 top
J6  [1X09_NO_SILK]  36.58,48.01 0 top
J7  [USB-C-16P-2LAYER-PADS]  129.67,24.38 270 top
J8  MICROMOD-2222-C  [M.2-CONNECTOR-E]  147.57,31.5 270 top
J9  QWIIC_RIGHT_ANGLE  [JST04_1MM_RA]  161.54,18.8 0 top
J10  [JST-2-SMD]  127.25,39.12 90 top
J11  [1X02_NO_SILK]  124.71,33.4 270 top
J12  Vertical Qwiic Connector  [JST04_1MM_VERT]  169.67,18.29 180 top
J13  [1X09_NO_SILK]  146.3,48.01 0 top
J14  [USB-C-16P-2LAYER-PADS]  19.94,60.45 270 top
J15  MICROMOD-2222-C  [M.2-CONNECTOR-E]  37.85,31.5 270 top
J16  MICROMOD-2222-C  [M.2-CONNECTOR-E]  37.85,67.56 270 top
J17  QWIIC_RIGHT_ANGLE  [JST04_1MM_RA]  51.82,54.86 0 top
J18  [JST-2-SMD]  17.53,75.18 90 top
J19  [1X02_NO_SILK]  14.99,69.47 270 top
J20  Vertical Qwiic Connector  [JST04_1MM_VERT]  59.94,54.36 180 top
J21  [1X09_NO_SILK]  36.58,84.07 0 top
J22  [USB-C-16P-2LAYER-PADS]  129.67,60.45 270 top
J23  MICROMOD-2222-C  [M.2-CONNECTOR-E]  147.57,67.56 270 top
J24  QWIIC_RIGHT_ANGLE  [JST04_1MM_RA]  161.54,54.86 0 top
J25  [JST-2-SMD]  127.25,75.18 90 top
J26  [1X02_NO_SILK]  124.71,69.47 270 top
J27  Vertical Qwiic Connector  [JST04_1MM_VERT]  169.67,54.36 180 top
J28  [1X09_NO_SILK]  146.3,84.07 0 top
J29  [USB-C-16P-2LAYER-PADS]  19.94,96.52 270 top
J30  MICROMOD-2222-C  [M.2-CONNECTOR-E]  37.85,103.63 270 top
J31  QWIIC_RIGHT_ANGLE  [JST04_1MM_RA]  51.82,90.93 0 top
J32  [JST-2-SMD]  17.53,111.25 90 top
J33  [1X02_NO_SILK]  14.99,105.54 270 top
J34  Vertical Qwiic Connector  [JST04_1MM_VERT]  59.94,90.42 180 top
J35  [1X09_NO_SILK]  36.58,120.14 0 top
J36  [USB-C-16P-2LAYER-PADS]  129.67,96.52 270 top
J37  MICROMOD-2222-C  [M.2-CONNECTOR-E]  147.57,103.63 270 top
J38  QWIIC_RIGHT_ANGLE  [JST04_1MM_RA]  161.54,90.93 0 top
J39  [JST-2-SMD]  127.25,111.25 90 top
J40  [1X02_NO_SILK]  124.71,105.54 270 top
J41  Vertical Qwiic Connector  [JST04_1MM_VERT]  169.67,90.42 180 top
J42  [1X09_NO_SILK]  146.3,120.14 0 top
J43  [USB-C-16P-2LAYER-PADS]  19.94,132.59 270 top
J44  MICROMOD-2222-C  [M.2-CONNECTOR-E]  37.85,139.7 270 top
J45  QWIIC_RIGHT_ANGLE  [JST04_1MM_RA]  51.82,127 0 top
J46  [JST-2-SMD]  17.53,147.32 90 top
J47  [1X02_NO_SILK]  14.99,141.61 270 top
J48  Vertical Qwiic Connector  [JST04_1MM_VERT]  59.94,126.49 180 top
J49  [1X09_NO_SILK]  36.58,156.21 0 top
J50  [USB-C-16P-2LAYER-PADS]  129.67,132.59 270 top
J51  MICROMOD-2222-C  [M.2-CONNECTOR-E]  147.57,139.7 270 top
J52  QWIIC_RIGHT_ANGLE  [JST04_1MM_RA]  161.54,127 0 top
J53  [JST-2-SMD]  127.25,147.32 90 top
J54  [1X02_NO_SILK]  124.71,141.61 270 top
J55  Vertical Qwiic Connector  [JST04_1MM_VERT]  169.67,126.49 180 top
J56  [1X09_NO_SILK]  146.3,156.21 0 top
J57  [USB-C-16P-2LAYER-PADS]  19.94,168.66 270 top
J58  MICROMOD-2222-C  [M.2-CONNECTOR-E]  37.85,175.77 270 top
J59  QWIIC_RIGHT_ANGLE  [JST04_1MM_RA]  51.82,163.07 0 top
J60  [JST-2-SMD]  17.53,183.39 90 top
J61  [1X02_NO_SILK]  14.99,177.67 270 top
J62  Vertical Qwiic Connector  [JST04_1MM_VERT]  59.94,162.56 180 top
J63  [1X09_NO_SILK]  36.58,192.28 0 top
J64  [USB-C-16P-2LAYER-PADS]  129.67,168.66 270 top
J65  MICROMOD-2222-C  [M.2-CONNECTOR-E]  147.57,175.77 270 top
J66  QWIIC_RIGHT_ANGLE  [JST04_1MM_RA]  161.54,163.07 0 top
J67  [JST-2-SMD]  127.25,183.39 90 top
J68  [1X02_NO_SILK]  124.71,177.67 270 top
J69  Vertical Qwiic Connector  [JST04_1MM_VERT]  169.67,162.56 180 top
J70  [1X09_NO_SILK]  146.3,192.28 0 top
J71  [USB-C-16P-2LAYER-PADS]  19.94,204.72 270 top
J72  MICROMOD-2222-C  [M.2-CONNECTOR-E]  37.85,211.84 270 top
J73  QWIIC_RIGHT_ANGLE  [JST04_1MM_RA]  51.82,199.14 0 top
J74  [JST-2-SMD]  17.53,219.46 90 top
J75  [1X02_NO_SILK]  14.99,213.74 270 top
J76  Vertical Qwiic Connector  [JST04_1MM_VERT]  59.94,198.63 180 top
J77  [1X09_NO_SILK]  36.58,228.35 0 top
J78  [USB-C-16P-2LAYER-PADS]  129.67,204.72 270 top
J79  MICROMOD-2222-C  [M.2-CONNECTOR-E]  147.57,211.84 270 top
J80  QWIIC_RIGHT_ANGLE  [JST04_1MM_RA]  161.54,199.14 0 top
J81  [JST-2-SMD]  127.25,219.46 90 top
J82  [1X02_NO_SILK]  124.71,213.74 270 top
J83  Vertical Qwiic Connector  [JST04_1MM_VERT]  169.67,198.63 180 top
J84  [1X09_NO_SILK]  146.3,228.35 0 top
JP1  3V3 LED  [SMT-JUMPER_2_NC_TRACE_SILK]  138.68,47.37 0 bottom
JP2  VE  [SMT-JUMPER_2_NO_SILK]  139.95,30.23 0 bottom
JP3  3V3 LED  [SMT-JUMPER_2_NC_TRACE_SILK]  28.96,83.44 0 bottom
JP4  3V3 LED  [SMT-JUMPER_2_NC_TRACE_SILK]  28.96,47.37 0 bottom
JP5  VE  [SMT-JUMPER_2_NO_SILK]  30.23,66.29 0 bottom
JP6  VE  [SMT-JUMPER_2_NO_SILK]  30.23,30.23 0 bottom
JP7  3V3 LED  [SMT-JUMPER_2_NC_TRACE_SILK]  138.68,83.44 0 bottom
JP8  VE  [SMT-JUMPER_2_NO_SILK]  139.95,66.29 0 bottom
JP9  3V3 LED  [SMT-JUMPER_2_NC_TRACE_SILK]  28.96,119.51 0 bottom
JP10  VE  [SMT-JUMPER_2_NO_SILK]  30.23,102.36 0 bottom
JP11  3V3 LED  [SMT-JUMPER_2_NC_TRACE_SILK]  138.68,119.51 0 bottom
JP12  VE  [SMT-JUMPER_2_NO_SILK]  139.95,102.36 0 bottom
JP13  3V3 LED  [SMT-JUMPER_2_NC_TRACE_SILK]  28.96,155.58 0 bottom
JP14  VE  [SMT-JUMPER_2_NO_SILK]  30.23,138.43 0 bottom
JP15  3V3 LED  [SMT-JUMPER_2_NC_TRACE_SILK]  138.68,155.58 0 bottom
JP16  VE  [SMT-JUMPER_2_NO_SILK]  139.95,138.43 0 bottom
JP17  3V3 LED  [SMT-JUMPER_2_NC_TRACE_SILK]  28.96,191.64 0 bottom
JP18  VE  [SMT-JUMPER_2_NO_SILK]  30.23,174.5 0 bottom
JP19  3V3 LED  [SMT-JUMPER_2_NC_TRACE_SILK]  138.68,191.64 0 bottom
JP20  VE  [SMT-JUMPER_2_NO_SILK]  139.95,174.5 0 bottom
JP21  3V3 LED  [SMT-JUMPER_2_NC_TRACE_SILK]  28.96,227.71 0 bottom
JP22  VE  [SMT-JUMPER_2_NO_SILK]  30.23,210.57 0 bottom
JP23  3V3 LED  [SMT-JUMPER_2_NC_TRACE_SILK]  138.68,227.71 0 bottom
JP24  VE  [SMT-JUMPER_2_NO_SILK]  139.95,210.57 0 bottom
LOGO1  SFE_LOGO_NAME_FLAME.2_INCH  [SFE_LOGO_NAME_FLAME_.2]  45.47,35.31 0 bottom
LOGO2  QWIIC_LOGO_CONNECTOR  [QWIIC_5.5MM]  47.12,16.83 90 top
LOGO3  OSHW-LOGOM  [OSHW-LOGO-M]  45.34,24.64 0 bottom
LOGO4  QWIIC_LOGO_CONNECTOR  [QWIIC_5.5MM]  156.84,16.83 90 top
LOGO5  OSHW-LOGOM  [OSHW-LOGO-M]  155.07,24.64 0 bottom
LOGO6  SFE_LOGO_NAME_FLAME.2_INCH  [SFE_LOGO_NAME_FLAME_.2]  155.19,35.31 0 bottom
LOGO7  QWIIC_LOGO_CONNECTOR  [QWIIC_5.5MM]  47.12,52.9 90 top
LOGO8  OSHW-LOGOM  [OSHW-LOGO-M]  45.34,60.71 0 bottom
LOGO9  SFE_LOGO_NAME_FLAME.2_INCH  [SFE_LOGO_NAME_FLAME_.2]  45.47,71.37 0 bottom
LOGO10  QWIIC_LOGO_CONNECTOR  [QWIIC_5.5MM]  156.84,52.9 90 top
LOGO11  OSHW-LOGOM  [OSHW-LOGO-M]  155.07,60.71 0 bottom
LOGO12  SFE_LOGO_NAME_FLAME.2_INCH  [SFE_LOGO_NAME_FLAME_.2]  155.19,71.37 0 bottom
LOGO13  QWIIC_LOGO_CONNECTOR  [QWIIC_5.5MM]  47.12,88.96 90 top
LOGO14  OSHW-LOGOM  [OSHW-LOGO-M]  45.34,96.77 0 bottom
LOGO15  SFE_LOGO_NAME_FLAME.2_INCH  [SFE_LOGO_NAME_FLAME_.2]  45.47,107.44 0 bottom
LOGO16  QWIIC_LOGO_CONNECTOR  [QWIIC_5.5MM]  156.84,88.96 90 top
LOGO17  OSHW-LOGOM  [OSHW-LOGO-M]  155.07,96.77 0 bottom
LOGO18  SFE_LOGO_NAME_FLAME.2_INCH  [SFE_LOGO_NAME_FLAME_.2]  155.19,107.44 0 bottom
LOGO19  QWIIC_LOGO_CONNECTOR  [QWIIC_5.5MM]  47.12,125.03 90 top
LOGO20  OSHW-LOGOM  [OSHW-LOGO-M]  45.34,132.84 0 bottom
LOGO21  SFE_LOGO_NAME_FLAME.2_INCH  [SFE_LOGO_NAME_FLAME_.2]  45.47,143.51 0 bottom
LOGO22  QWIIC_LOGO_CONNECTOR  [QWIIC_5.5MM]  156.84,125.03 90 top
LOGO23  OSHW-LOGOM  [OSHW-LOGO-M]  155.07,132.84 0 bottom
LOGO24  SFE_LOGO_NAME_FLAME.2_INCH  [SFE_LOGO_NAME_FLAME_.2]  155.19,143.51 0 bottom
LOGO25  QWIIC_LOGO_CONNECTOR  [QWIIC_5.5MM]  47.12,161.1 90 top
LOGO26  OSHW-LOGOM  [OSHW-LOGO-M]  45.34,168.91 0 bottom
LOGO27  SFE_LOGO_NAME_FLAME.2_INCH  [SFE_LOGO_NAME_FLAME_.2]  45.47,179.58 0 bottom
LOGO28  QWIIC_LOGO_CONNECTOR  [QWIIC_5.5MM]  156.84,161.1 90 top
LOGO29  OSHW-LOGOM  [OSHW-LOGO-M]  155.07,168.91 0 bottom
LOGO30  SFE_LOGO_NAME_FLAME.2_INCH  [SFE_LOGO_NAME_FLAME_.2]  155.19,179.58 0 bottom
LOGO31  QWIIC_LOGO_CONNECTOR  [QWIIC_5.5MM]  47.12,197.17 90 top
LOGO32  OSHW-LOGOM  [OSHW-LOGO-M]  45.34,204.98 0 bottom
LOGO33  SFE_LOGO_NAME_FLAME.2_INCH  [SFE_LOGO_NAME_FLAME_.2]  45.47,215.65 0 bottom
LOGO34  QWIIC_LOGO_CONNECTOR  [QWIIC_5.5MM]  156.84,197.17 90 top
LOGO35  OSHW-LOGOM  [OSHW-LOGO-M]  155.07,204.98 0 bottom
LOGO36  SFE_LOGO_NAME_FLAME.2_INCH  [SFE_LOGO_NAME_FLAME_.2]  155.19,215.65 0 bottom
MEAS  [COMBO-JUMPER_2_NC_TRACE]  24.13,21.59 270 bottom
MEAS1  [COMBO-JUMPER_2_NC_TRACE]  133.86,21.59 270 bottom
MEAS2  [COMBO-JUMPER_2_NC_TRACE]  24.13,57.66 270 bottom
MEAS3  [COMBO-JUMPER_2_NC_TRACE]  133.86,57.66 270 bottom
MEAS4  [COMBO-JUMPER_2_NC_TRACE]  24.13,93.73 270 bottom
MEAS5  [COMBO-JUMPER_2_NC_TRACE]  133.86,93.73 270 bottom
MEAS6  [COMBO-JUMPER_2_NC_TRACE]  24.13,129.79 270 bottom
MEAS7  [COMBO-JUMPER_2_NC_TRACE]  133.86,129.79 270 bottom
MEAS8  [COMBO-JUMPER_2_NC_TRACE]  24.13,165.86 270 bottom
MEAS9  [COMBO-JUMPER_2_NC_TRACE]  133.86,165.86 270 bottom
MEAS10  [COMBO-JUMPER_2_NC_TRACE]  24.13,201.93 270 bottom
MEAS11  [COMBO-JUMPER_2_NC_TRACE]  133.86,201.93 270 bottom
R1  2.2k  [0603]  30.86,39.12 270 top
R2  5.1k  [0603]  21.21,26.92 270 top
R3  5.1k  [0603]  21.21,21.84 90 top
R4  1k  [0603]  28.7,42.93 270 top
R5  100k  [0603]  27.69,26.42 270 top
R6  5.1k  [0603]  130.94,26.92 270 top
R7  5.1k  [0603]  130.94,21.84 90 top
R8  1k  [0603]  138.68,47.37 0 top
R9  100k  [0603]  137.41,26.42 270 top
R10  2.2k  [0603]  140.59,39.12 270 top
R11  1k  [0603]  28.96,47.37 0 top
R12  1k  [0603]  138.43,42.93 270 top
R13  5.1k  [0603]  21.21,62.99 270 top
R14  5.1k  [0603]  21.21,57.91 90 top
R15  1k  [0603]  28.96,83.44 0 top
R16  100k  [0603]  27.69,62.48 270 top
R17  2.2k  [0603]  30.86,75.18 270 top
R18  1k  [0603]  28.7,78.99 270 top
R19  5.1k  [0603]  130.94,62.99 270 top
R20  5.1k  [0603]  130.94,57.91 90 top
R21  1k  [0603]  138.68,83.44 0 top
R22  100k  [0603]  137.41,62.48 270 top
R23  2.2k  [0603]  140.59,75.18 270 top
R24  1k  [0603]  138.43,78.99 270 top
R25  5.1k  [0603]  21.21,99.06 270 top
R26  5.1k  [0603]  21.21,93.98 90 top
R27  1k  [0603]  28.96,119.51 0 top
R28  100k  [0603]  27.69,98.55 270 top
R29  2.2k  [0603]  30.86,111.25 270 top
R30  1k  [0603]  28.7,115.06 270 top
R31  5.1k  [0603]  130.94,99.06 270 top
R32  5.1k  [0603]  130.94,93.98 90 top
R33  1k  [0603]  138.68,119.51 0 top
R34  100k  [0603]  137.41,98.55 270 top
R35  2.2k  [0603]  140.59,111.25 270 top
R36  1k  [0603]  138.43,115.06 270 top
R37  5.1k  [0603]  21.21,135.13 270 top
R38  5.1k  [0603]  21.21,130.05 90 top
R39  1k  [0603]  28.96,155.58 0 top
R40  100k  [0603]  27.69,134.62 270 top
R41  2.2k  [0603]  30.86,147.32 270 top
R42  1k  [0603]  28.7,151.13 270 top
R43  5.1k  [0603]  130.94,135.13 270 top
R44  5.1k  [0603]  130.94,130.05 90 top
R45  1k  [0603]  138.68,155.58 0 top
R46  100k  [0603]  137.41,134.62 270 top
R47  2.2k  [0603]  140.59,147.32 270 top
R48  1k  [0603]  138.43,151.13 270 top
R49  5.1k  [0603]  21.21,171.2 270 top
R50  5.1k  [0603]  21.21,166.12 90 top
R51  1k  [0603]  28.96,191.64 0 top
R52  100k  [0603]  27.69,170.69 270 top
R53  2.2k  [0603]  30.86,183.39 270 top
R54  1k  [0603]  28.7,187.2 270 top
R55  5.1k  [0603]  130.94,171.2 270 top
R56  5.1k  [0603]  130.94,166.12 90 top
R57  1k  [0603]  138.68,191.64 0 top
R58  100k  [0603]  137.41,170.69 270 top
R59  2.2k  [0603]  140.59,183.39 270 top
R60  1k  [0603]  138.43,187.2 270 top
R61  5.1k  [0603]  21.21,207.26 270 top
R62  5.1k  [0603]  21.21,202.18 90 top
R63  1k  [0603]  28.96,227.71 0 top
R64  100k  [0603]  27.69,206.76 270 top
R65  2.2k  [0603]  30.86,219.46 270 top
R66  1k  [0603]  28.7,223.27 270 top
R67  5.1k  [0603]  130.94,207.26 270 top
R68  5.1k  [0603]  130.94,202.18 90 top
R69  1k  [0603]  138.68,227.71 0 top
R70  100k  [0603]  137.41,206.76 270 top
R71  2.2k  [0603]  140.59,219.46 270 top
R72  1k  [0603]  138.43,223.27 270 top
S1  Reset  [TACTILE_SWITCH_SMD_5.2MM]  28.96,17.02 180 top
S2  BOOT  [TACTILE_SWITCH_SMD_5.2MM]  37.85,17.02 180 top
S3  Reset  [TACTILE_SWITCH_SMD_5.2MM]  138.68,17.02 180 top
S4  BOOT  [TACTILE_SWITCH_SMD_5.2MM]  147.57,17.02 180 top
S5  Reset  [TACTILE_SWITCH_SMD_5.2MM]  28.96,53.09 180 top
S6  BOOT  [TACTILE_SWITCH_SMD_5.2MM]  37.85,53.09 180 top
S7  Reset  [TACTILE_SWITCH_SMD_5.2MM]  138.68,53.09 180 top
S8  BOOT  [TACTILE_SWITCH_SMD_5.2MM]  147.57,53.09 180 top
S9  Reset  [TACTILE_SWITCH_SMD_5.2MM]  28.96,89.15 180 top
S10  BOOT  [TACTILE_SWITCH_SMD_5.2MM]  37.85,89.15 180 top
S11  Reset  [TACTILE_SWITCH_SMD_5.2MM]  138.68,89.15 180 top
S12  BOOT  [TACTILE_SWITCH_SMD_5.2MM]  147.57,89.15 180 top
S13  Reset  [TACTILE_SWITCH_SMD_5.2MM]  28.96,125.22 180 top
S14  BOOT  [TACTILE_SWITCH_SMD_5.2MM]  37.85,125.22 180 top
S15  Reset  [TACTILE_SWITCH_SMD_5.2MM]  138.68,125.22 180 top
S16  BOOT  [TACTILE_SWITCH_SMD_5.2MM]  147.57,125.22 180 top
S17  Reset  [TACTILE_SWITCH_SMD_5.2MM]  28.96,161.29 180 top
S18  BOOT  [TACTILE_SWITCH_SMD_5.2MM]  37.85,161.29 180 top
S19  Reset  [TACTILE_SWITCH_SMD_5.2MM]  138.68,161.29 180 top
S20  BOOT  [TACTILE_SWITCH_SMD_5.2MM]  147.57,161.29 180 top
S21  Reset  [TACTILE_SWITCH_SMD_5.2MM]  28.96,197.36 180 top
S22  BOOT  [TACTILE_SWITCH_SMD_5.2MM]  37.85,197.36 180 top
S23  Reset  [TACTILE_SWITCH_SMD_5.2MM]  138.68,197.36 180 top
S24  BOOT  [TACTILE_SWITCH_SMD_5.2MM]  147.57,197.36 180 top
TP1  TEST-POINT3X5  [PAD.03X.05]  50.55,22.61 0 bottom
TP2  TEST-POINT3X5  [PAD.03X.05]  53.09,26.42 0 bottom
TP3  TEST-POINT3X5  [PAD.03X.05]  160.27,22.61 0 bottom
TP4  TEST-POINT3X5  [PAD.03X.05]  162.81,26.42 0 bottom
TP5  TEST-POINT3X5  [PAD.03X.05]  50.55,58.67 0 bottom
TP6  TEST-POINT3X5  [PAD.03X.05]  53.09,62.48 0 bottom
TP7  TEST-POINT3X5  [PAD.03X.05]  160.27,58.67 0 bottom
TP8  TEST-POINT3X5  [PAD.03X.05]  162.81,62.48 0 bottom
TP9  TEST-POINT3X5  [PAD.03X.05]  50.55,94.74 0 bottom
TP10  TEST-POINT3X5  [PAD.03X.05]  53.09,98.55 0 bottom
TP11  TEST-POINT3X5  [PAD.03X.05]  160.27,94.74 0 bottom
TP12  TEST-POINT3X5  [PAD.03X.05]  162.81,98.55 0 bottom
TP13  TEST-POINT3X5  [PAD.03X.05]  50.55,130.81 0 bottom
TP14  TEST-POINT3X5  [PAD.03X.05]  53.09,134.62 0 bottom
TP15  TEST-POINT3X5  [PAD.03X.05]  160.27,130.81 0 bottom
TP16  TEST-POINT3X5  [PAD.03X.05]  162.81,134.62 0 bottom
TP17  TEST-POINT3X5  [PAD.03X.05]  50.55,166.88 0 bottom
TP18  TEST-POINT3X5  [PAD.03X.05]  53.09,170.69 0 bottom
TP19  TEST-POINT3X5  [PAD.03X.05]  160.27,166.88 0 bottom
TP20  TEST-POINT3X5  [PAD.03X.05]  162.81,170.69 0 bottom
TP21  TEST-POINT3X5  [PAD.03X.05]  50.55,202.95 0 bottom
TP22  TEST-POINT3X5  [PAD.03X.05]  53.09,206.76 0 bottom
TP23  TEST-POINT3X5  [PAD.03X.05]  160.27,202.95 0 bottom
TP24  TEST-POINT3X5  [PAD.03X.05]  162.81,206.76 0 bottom
U1  MCP73831  [SOT23-5]  27.69,39.12 180 top
U2  AP7361C-33FGEUDFN-8  [UDFN-8]  134.75,25.91 0 top
U3  MCP73831  [SOT23-5]  137.41,39.12 180 top
U4  AP7361C-33FGEUDFN-8  [UDFN-8]  25.02,61.98 0 top
U5  AP7361C-33FGEUDFN-8  [UDFN-8]  25.02,25.91 0 top
U6  MCP73831  [SOT23-5]  27.69,75.18 180 top
U7  AP7361C-33FGEUDFN-8  [UDFN-8]  134.75,61.98 0 top
U8  MCP73831  [SOT23-5]  137.41,75.18 180 top
U9  AP7361C-33FGEUDFN-8  [UDFN-8]  25.02,98.04 0 top
U10  MCP73831  [SOT23-5]  27.69,111.25 180 top
U11  AP7361C-33FGEUDFN-8  [UDFN-8]  134.75,98.04 0 top
U12  MCP73831  [SOT23-5]  137.41,111.25 180 top
U13  AP7361C-33FGEUDFN-8  [UDFN-8]  25.02,134.11 0 top
U14  MCP73831  [SOT23-5]  27.69,147.32 180 top
U15  AP7361C-33FGEUDFN-8  [UDFN-8]  134.75,134.11 0 top
U16  MCP73831  [SOT23-5]  137.41,147.32 180 top
U17  AP7361C-33FGEUDFN-8  [UDFN-8]  25.02,170.18 0 top
U18  MCP73831  [SOT23-5]  27.69,183.39 180 top
U19  AP7361C-33FGEUDFN-8  [UDFN-8]  134.75,170.18 0 top
U20  MCP73831  [SOT23-5]  137.41,183.39 180 top
U21  AP7361C-33FGEUDFN-8  [UDFN-8]  25.02,206.25 0 top
U22  MCP73831  [SOT23-5]  27.69,219.46 180 top
U23  AP7361C-33FGEUDFN-8  [UDFN-8]  134.75,206.25 0 top
U24  MCP73831  [SOT23-5]  137.41,219.46 180 top
U$1  [#3#3V_EN#0]  29.46,30.23 0 bottom
U$2  QWIIC_BOARD_OUTLINESTANDOFF  [QWIIC_BOARD_MOUNT_SMD_STANDOFFS]  106.43,31.5 0 top
U$3  [3V30]  19.43,47.37 0 top
U$4  [CHG0]  19.43,45.47 0 top
U$5  QWIIC_BOARD_OUTLINESTANDOFF  [QWIIC_BOARD_MOUNT_SMD_STANDOFFS]  75.95,31.5 0 top
U$6  [#3#3V#0]  34.67,47.24 0 bottom
U$7  [#BYP#0]  25.4,35.18 0 bottom
U$8  [#GND#0]  39.12,43.18 90 top
U$9  [#MEAS#0]  30.23,21.59 0 bottom
U$10  [SFE_LOGO_FLAME_.2]  141.48,44.32 0 top
U$11  [#0]  15.24,33.4 0 top
U$12  [#VBAT#0]  21.08,33.4 0 bottom
U$13  [MICROMOD_LOGO_.5]  200.79,47.12 0 top
U$14  [#GND#0]  39.12,43.18 90 bottom
U$15  [##INT##0]  41.66,43.56 90 top
U$16  [##INT##0]  41.66,43.56 90 bottom
U$17  [#D0#0]  44.2,44.2 90 top
U$18  [#D0#0]  44.2,44.2 90 bottom
U$19  [QWIIC_CARRIER_#_2X10]  79.88,16.38 0 top
U$20  [#D1#0]  46.74,44.45 90 top
U$21  [#D1#0]  46.74,44.45 90 bottom
U$22  [#CIPO#0]  49.28,42.67 90 top
U$23  [#CIPO#0]  49.28,42.67 90 bottom
U$24  [#COPI#0]  51.82,42.67 90 top
U$25  [#COPI#0]  51.82,42.67 90 bottom
U$26  [#SCK#0]  54.36,43.31 90 top
U$27  [#SCK#0]  54.36,43.31 90 bottom
U$28  [##CS##0]  56.9,44.2 90 top
U$29  [##CS##0]  56.9,44.2 90 bottom
U$30  [RESET0]  24.51,14.22 90 top
U$31  [BOOT0]  33.53,14.61 90 top
U$32  [#0]  21.46,41.53 0 top
U$33  [#GND#0]  19.81,30.86 0 bottom
U$34  [22220]  40.89,19.56 0 top
U$35  [#3#3V#0]  36.58,42.8 90 top
U$36  [#0]  14.86,31.12 0 top
U$37  [#0]  21.08,37.21 0 top
U$38  [#3#3V#0]  36.58,42.8 90 bottom
U$39  [QWIIC_CARRIER_#_2X10]  56.64,30.23 0 bottom
U$40  [MICROMOD_LOGO_.5]  155.19,32.77 0 bottom
U$41  [CHG0]  129.16,45.47 0 top
U$42  [#3#3V#0]  144.4,47.24 0 bottom
U$43  [#BYP#0]  135.13,35.18 0 bottom
U$44  [SFE_LOGO_FLAME_.2]  31.75,44.32 0 top
U$45  [#MEAS#0]  139.95,21.59 0 bottom
U$46  QWIIC_BOARD_OUTLINESTANDOFF  [QWIIC_BOARD_MOUNT_SMD_STANDOFFS]  185.67,31.5 0 top
U$47  [3V30]  129.16,47.37 0 top
U$48  [#3#3V_EN#0]  139.19,30.23 0 bottom
U$49  [#GND#0]  148.84,43.18 90 top
U$50  [#GND#0]  148.84,43.18 90 bottom
U$51  [#CIPO#0]  159,42.67 90 top
U$52  [#CIPO#0]  159,42.67 90 bottom
U$53  [#COPI#0]  161.54,42.67 90 top
U$54  [#COPI#0]  161.54,42.67 90 bottom
U$55  [#SCK#0]  164.08,43.31 90 top
U$56  [#SCK#0]  164.08,43.31 90 bottom
U$57  [#VBAT#0]  130.81,33.4 0 bottom
U$58  [#GND#0]  129.54,30.86 0 bottom
U$59  [#0]  124.97,33.4 0 top
U$60  [#0]  131.19,41.53 0 top
U$61  [#0]  124.59,31.12 0 top
U$62  [#0]  130.81,37.21 0 top
U$63  [#D0#0]  153.92,44.2 90 top
U$64  [#D0#0]  153.92,44.2 90 bottom
U$65  [#D1#0]  156.46,44.45 90 top
U$66  [#D1#0]  156.46,44.45 90 bottom
U$67  [MICROMOD_LOGO_.5]  91.06,47.12 0 top
U$68  [MICROMOD_LOGO_.5]  45.47,32.77 0 bottom
U$69  [RESET0]  134.24,14.22 90 top
U$70  [BOOT0]  143.26,14.61 90 top
U$71  [22220]  150.62,19.56 0 top
U$72  [#3#3V#0]  146.3,42.8 90 top
U$73  [#3#3V#0]  146.3,42.8 90 bottom
U$74  [##CS##0]  166.62,44.2 90 top
U$75  [##CS##0]  166.62,44.2 90 bottom
U$76  [##INT##0]  151.38,43.56 90 top
U$77  [##INT##0]  151.38,43.56 90 bottom
U$78  QWIIC_BOARD_OUTLINESTANDOFF  [QWIIC_BOARD_MOUNT_SMD_STANDOFFS]  216.15,31.5 0 top
U$79  [QWIIC_CARRIER_#_2X10]  189.61,16.38 0 top
U$80  [QWIIC_CARRIER_#_2X10]  166.37,30.23 0 bottom
U$81  [SFE_LOGO_FLAME_.2]  31.75,80.39 0 top
U$82  [MICROMOD_LOGO_.5]  91.06,83.19 0 top
U$83  [MICROMOD_LOGO_.5]  45.47,68.83 0 bottom
U$84  [CHG0]  19.43,81.53 0 top
U$85  [#3#3V#0]  34.67,83.31 0 bottom
U$86  [#BYP#0]  25.4,71.25 0 bottom
U$87  [#MEAS#0]  30.23,57.66 0 bottom
U$88  QWIIC_BOARD_OUTLINESTANDOFF  [QWIIC_BOARD_MOUNT_SMD_STANDOFFS]  75.95,67.56 0 top
U$89  [3V30]  19.43,83.44 0 top
U$90  [#3#3V_EN#0]  29.46,66.29 0 bottom
U$91  [#GND#0]  39.12,79.25 90 top
U$92  [#GND#0]  39.12,79.25 90 bottom
U$93  [#CIPO#0]  49.28,78.74 90 top
U$94  [#CIPO#0]  49.28,78.74 90 bottom
U$95  [#COPI#0]  51.82,78.74 90 top
U$96  [#COPI#0]  51.82,78.74 90 bottom
U$97  [#SCK#0]  54.36,79.38 90 top
U$98  [#SCK#0]  54.36,79.38 90 bottom
U$99  [#VBAT#0]  21.08,69.47 0 bottom
U$100  [#GND#0]  19.81,66.93 0 bottom
U$101  [#0]  15.24,69.47 0 top
U$102  [#0]  21.46,77.6 0 top
U$103  [#0]  14.86,67.18 0 top
U$104  [#0]  21.08,73.28 0 top
U$105  [#D0#0]  44.2,80.26 90 top
U$106  [#D0#0]  44.2,80.26 90 bottom
U$107  [#D1#0]  46.74,80.52 90 top
U$108  [#D1#0]  46.74,80.52 90 bottom
U$109  [RESET0]  24.51,50.29 90 top
U$110  [BOOT0]  33.53,50.67 90 top
U$111  [22220]  40.89,55.63 0 top
U$112  [#3#3V#0]  36.58,78.87 90 top
U$113  [#3#3V#0]  36.58,78.87 90 bottom
U$114  [##CS##0]  56.9,80.26 90 top
U$115  [##CS##0]  56.9,80.26 90 bottom
U$116  [##INT##0]  41.66,79.63 90 top
U$117  [##INT##0]  41.66,79.63 90 bottom
U$118  QWIIC_BOARD_OUTLINESTANDOFF  [QWIIC_BOARD_MOUNT_SMD_STANDOFFS]  106.43,67.56 0 top
U$119  [QWIIC_CARRIER_#_2X10]  79.88,52.45 0 top
U$120  [QWIIC_CARRIER_#_2X10]  56.64,66.29 0 bottom
U$121  [SFE_LOGO_FLAME_.2]  141.48,80.39 0 top
U$122  [MICROMOD_LOGO_.5]  200.79,83.19 0 top
U$123  [MICROMOD_LOGO_.5]  155.19,68.83 0 bottom
U$124  [CHG0]  129.16,81.53 0 top
U$125  [#3#3V#0]  144.4,83.31 0 bottom
U$126  [#BYP#0]  135.13,71.25 0 bottom
U$127  [#MEAS#0]  139.95,57.66 0 bottom
U$128  QWIIC_BOARD_OUTLINESTANDOFF  [QWIIC_BOARD_MOUNT_SMD_STANDOFFS]  185.67,67.56 0 top
U$129  [3V30]  129.16,83.44 0 top
U$130  [#3#3V_EN#0]  139.19,66.29 0 bottom
U$131  [#GND#0]  148.84,79.25 90 top
U$132  [#GND#0]  148.84,79.25 90 bottom
U$133  [#CIPO#0]  159,78.74 90 top
U$134  [#CIPO#0]  159,78.74 90 bottom
U$135  [#COPI#0]  161.54,78.74 90 top
U$136  [#COPI#0]  161.54,78.74 90 bottom
U$137  [#SCK#0]  164.08,79.38 90 top
U$138  [#SCK#0]  164.08,79.38 90 bottom
U$139  [#VBAT#0]  130.81,69.47 0 bottom
U$140  [#GND#0]  129.54,66.93 0 bottom
U$141  [#0]  124.97,69.47 0 top
U$142  [#0]  131.19,77.6 0 top
U$143  [#0]  124.59,67.18 0 top
U$144  [#0]  130.81,73.28 0 top
U$145  [#D0#0]  153.92,80.26 90 top
U$146  [#D0#0]  153.92,80.26 90 bottom
U$147  [#D1#0]  156.46,80.52 90 top
U$148  [#D1#0]  156.46,80.52 90 bottom
U$149  [RESET0]  134.24,50.29 90 top
U$150  [BOOT0]  143.26,50.67 90 top
U$151  [22220]  150.62,55.63 0 top
U$152  [#3#3V#0]  146.3,78.87 90 top
U$153  [#3#3V#0]  146.3,78.87 90 bottom
U$154  [##CS##0]  166.62,80.26 90 top
U$155  [##CS##0]  166.62,80.26 90 bottom
U$156  [##INT##0]  151.38,79.63 90 top
U$157  [##INT##0]  151.38,79.63 90 bottom
U$158  QWIIC_BOARD_OUTLINESTANDOFF  [QWIIC_BOARD_MOUNT_SMD_STANDOFFS]  216.15,67.56 0 top
U$159  [QWIIC_CARRIER_#_2X10]  189.61,52.45 0 top
U$160  [QWIIC_CARRIER_#_2X10]  166.37,66.29 0 bottom
U$161  [SFE_LOGO_FLAME_.2]  31.75,116.46 0 top
U$162  [MICROMOD_LOGO_.5]  91.06,119.25 0 top
U$163  [MICROMOD_LOGO_.5]  45.47,104.9 0 bottom
U$164  [CHG0]  19.43,117.6 0 top
U$165  [#3#3V#0]  34.67,119.38 0 bottom
U$166  [#BYP#0]  25.4,107.31 0 bottom
U$167  [#MEAS#0]  30.23,93.73 0 bottom
U$168  QWIIC_BOARD_OUTLINESTANDOFF  [QWIIC_BOARD_MOUNT_SMD_STANDOFFS]  75.95,103.63 0 top
U$169  [3V30]  19.43,119.51 0 top
U$170  [#3#3V_EN#0]  29.46,102.36 0 bottom
U$171  [#GND#0]  39.12,115.32 90 top
U$172  [#GND#0]  39.12,115.32 90 bottom
U$173  [#CIPO#0]  49.28,114.81 90 top
U$174  [#CIPO#0]  49.28,114.81 90 bottom
U$175  [#COPI#0]  51.82,114.81 90 top
U$176  [#COPI#0]  51.82,114.81 90 bottom
U$177  [#SCK#0]  54.36,115.44 90 top
U$178  [#SCK#0]  54.36,115.44 90 bottom
U$179  [#VBAT#0]  21.08,105.54 0 bottom
U$180  [#GND#0]  19.81,103 0 bottom
U$181  [#0]  15.24,105.54 0 top
U$182  [#0]  21.46,113.67 0 top
U$183  [#0]  14.86,103.25 0 top
U$184  [#0]  21.08,109.35 0 top
U$185  [#D0#0]  44.2,116.33 90 top
U$186  [#D0#0]  44.2,116.33 90 bottom
U$187  [#D1#0]  46.74,116.59 90 top
U$188  [#D1#0]  46.74,116.59 90 bottom
U$189  [RESET0]  24.51,86.36 90 top
U$190  [BOOT0]  33.53,86.74 90 top
U$191  [22220]  40.89,91.69 0 top
U$192  [#3#3V#0]  36.58,114.94 90 top
U$193  [#3#3V#0]  36.58,114.94 90 bottom
U$194  [##CS##0]  56.9,116.33 90 top
U$195  [##CS##0]  56.9,116.33 90 bottom
U$196  [##INT##0]  41.66,115.7 90 top
U$197  [##INT##0]  41.66,115.7 90 bottom
U$198  QWIIC_BOARD_OUTLINESTANDOFF  [QWIIC_BOARD_MOUNT_SMD_STANDOFFS]  106.43,103.63 0 top
U$199  [QWIIC_CARRIER_#_2X10]  79.88,88.52 0 top
U$200  [QWIIC_CARRIER_#_2X10]  56.64,102.36 0 bottom
U$201  [SFE_LOGO_FLAME_.2]  141.48,116.46 0 top
U$202  [MICROMOD_LOGO_.5]  200.79,119.25 0 top
U$203  [MICROMOD_LOGO_.5]  155.19,104.9 0 bottom
U$204  [CHG0]  129.16,117.6 0 top
U$205  [#3#3V#0]  144.4,119.38 0 bottom
U$206  [#BYP#0]  135.13,107.31 0 bottom
U$207  [#MEAS#0]  139.95,93.73 0 bottom
U$208  QWIIC_BOARD_OUTLINESTANDOFF  [QWIIC_BOARD_MOUNT_SMD_STANDOFFS]  185.67,103.63 0 top
U$209  [3V30]  129.16,119.51 0 top
U$210  [#3#3V_EN#0]  139.19,102.36 0 bottom
U$211  [#GND#0]  148.84,115.32 90 top
U$212  [#GND#0]  148.84,115.32 90 bottom
U$213  [#CIPO#0]  159,114.81 90 top
U$214  [#CIPO#0]  159,114.81 90 bottom
U$215  [#COPI#0]  161.54,114.81 90 top
U$216  [#COPI#0]  161.54,114.81 90 bottom
U$217  [#SCK#0]  164.08,115.44 90 top
U$218  [#SCK#0]  164.08,115.44 90 bottom
U$219  [#VBAT#0]  130.81,105.54 0 bottom
U$220  [#GND#0]  129.54,103 0 bottom
U$221  [#0]  124.97,105.54 0 top
U$222  [#0]  131.19,113.67 0 top
U$223  [#0]  124.59,103.25 0 top
U$224  [#0]  130.81,109.35 0 top
U$225  [#D0#0]  153.92,116.33 90 top
U$226  [#D0#0]  153.92,116.33 90 bottom
U$227  [#D1#0]  156.46,116.59 90 top
U$228  [#D1#0]  156.46,116.59 90 bottom
U$229  [RESET0]  134.24,86.36 90 top
U$230  [BOOT0]  143.26,86.74 90 top
U$231  [22220]  150.62,91.69 0 top
U$232  [#3#3V#0]  146.3,114.94 90 top
U$233  [#3#3V#0]  146.3,114.94 90 bottom
U$234  [##CS##0]  166.62,116.33 90 top
U$235  [##CS##0]  166.62,116.33 90 bottom
U$236  [##INT##0]  151.38,115.7 90 top
U$237  [##INT##0]  151.38,115.7 90 bottom
U$238  QWIIC_BOARD_OUTLINESTANDOFF  [QWIIC_BOARD_MOUNT_SMD_STANDOFFS]  216.15,103.63 0 top
U$239  [QWIIC_CARRIER_#_2X10]  189.61,88.52 0 top
U$240  [QWIIC_CARRIER_#_2X10]  166.37,102.36 0 bottom
U$241  [SFE_LOGO_FLAME_.2]  31.75,152.53 0 top
U$242  [MICROMOD_LOGO_.5]  91.06,155.32 0 top
U$243  [MICROMOD_LOGO_.5]  45.47,140.97 0 bottom
U$244  [CHG0]  19.43,153.67 0 top
U$245  [#3#3V#0]  34.67,155.45 0 bottom
U$246  [#BYP#0]  25.4,143.38 0 bottom
U$247  [#MEAS#0]  30.23,129.79 0 bottom
U$248  QWIIC_BOARD_OUTLINESTANDOFF  [QWIIC_BOARD_MOUNT_SMD_STANDOFFS]  75.95,139.7 0 top
U$249  [3V30]  19.43,155.58 0 top
U$250  [#3#3V_EN#0]  29.46,138.43 0 bottom
U$251  [#GND#0]  39.12,151.38 90 top
U$252  [#GND#0]  39.12,151.38 90 bottom
U$253  [#CIPO#0]  49.28,150.88 90 top
U$254  [#CIPO#0]  49.28,150.88 90 bottom
U$255  [#COPI#0]  51.82,150.88 90 top
U$256  [#COPI#0]  51.82,150.88 90 bottom
U$257  [#SCK#0]  54.36,151.51 90 top
U$258  [#SCK#0]  54.36,151.51 90 bottom
U$259  [#VBAT#0]  21.08,141.61 0 bottom
U$260  [#GND#0]  19.81,139.06 0 bottom
U$261  [#0]  15.24,141.61 0 top
U$262  [#0]  21.46,149.73 0 top
U$263  [#0]  14.86,139.32 0 top
U$264  [#0]  21.08,145.41 0 top
U$265  [#D0#0]  44.2,152.4 90 top
U$266  [#D0#0]  44.2,152.4 90 bottom
U$267  [#D1#0]  46.74,152.65 90 top
U$268  [#D1#0]  46.74,152.65 90 bottom
U$269  [RESET0]  24.51,122.43 90 top
U$270  [BOOT0]  33.53,122.81 90 top
U$271  [22220]  40.89,127.76 0 top
U$272  [#3#3V#0]  36.58,151 90 top
U$273  [#3#3V#0]  36.58,151 90 bottom
U$274  [##CS##0]  56.9,152.4 90 top
U$275  [##CS##0]  56.9,152.4 90 bottom
U$276  [##INT##0]  41.66,151.77 90 top
U$277  [##INT##0]  41.66,151.77 90 bottom
U$278  QWIIC_BOARD_OUTLINESTANDOFF  [QWIIC_BOARD_MOUNT_SMD_STANDOFFS]  106.43,139.7 0 top
U$279  [QWIIC_CARRIER_#_2X10]  79.88,124.59 0 top
U$280  [QWIIC_CARRIER_#_2X10]  56.64,138.43 0 bottom
U$281  [SFE_LOGO_FLAME_.2]  141.48,152.53 0 top
U$282  [MICROMOD_LOGO_.5]  200.79,155.32 0 top
U$283  [MICROMOD_LOGO_.5]  155.19,140.97 0 bottom
U$284  [CHG0]  129.16,153.67 0 top
U$285  [#3#3V#0]  144.4,155.45 0 bottom
U$286  [#BYP#0]  135.13,143.38 0 bottom
U$287  [#MEAS#0]  139.95,129.79 0 bottom
U$288  QWIIC_BOARD_OUTLINESTANDOFF  [QWIIC_BOARD_MOUNT_SMD_STANDOFFS]  185.67,139.7 0 top
U$289  [3V30]  129.16,155.58 0 top
U$290  [#3#3V_EN#0]  139.19,138.43 0 bottom
U$291  [#GND#0]  148.84,151.38 90 top
U$292  [#GND#0]  148.84,151.38 90 bottom
U$293  [#CIPO#0]  159,150.88 90 top
U$294  [#CIPO#0]  159,150.88 90 bottom
U$295  [#COPI#0]  161.54,150.88 90 top
U$296  [#COPI#0]  161.54,150.88 90 bottom
U$297  [#SCK#0]  164.08,151.51 90 top
U$298  [#SCK#0]  164.08,151.51 90 bottom
U$299  [#VBAT#0]  130.81,141.61 0 bottom
U$300  [#GND#0]  129.54,139.06 0 bottom
U$301  [#0]  124.97,141.61 0 top
U$302  [#0]  131.19,149.73 0 top
U$303  [#0]  124.59,139.32 0 top
U$304  [#0]  130.81,145.41 0 top
U$305  [#D0#0]  153.92,152.4 90 top
U$306  [#D0#0]  153.92,152.4 90 bottom
U$307  [#D1#0]  156.46,152.65 90 top
U$308  [#D1#0]  156.46,152.65 90 bottom
U$309  [RESET0]  134.24,122.43 90 top
U$310  [BOOT0]  143.26,122.81 90 top
U$311  [22220]  150.62,127.76 0 top
U$312  [#3#3V#0]  146.3,151 90 top
U$313  [#3#3V#0]  146.3,151 90 bottom
U$314  [##CS##0]  166.62,152.4 90 top
U$315  [##CS##0]  166.62,152.4 90 bottom
U$316  [##INT##0]  151.38,151.77 90 top
U$317  [##INT##0]  151.38,151.77 90 bottom
U$318  QWIIC_BOARD_OUTLINESTANDOFF  [QWIIC_BOARD_MOUNT_SMD_STANDOFFS]  216.15,139.7 0 top
U$319  [QWIIC_CARRIER_#_2X10]  189.61,124.59 0 top
U$320  [QWIIC_CARRIER_#_2X10]  166.37,138.43 0 bottom
U$321  [SFE_LOGO_FLAME_.2]  31.75,188.59 0 top
U$322  [MICROMOD_LOGO_.5]  91.06,191.39 0 top
U$323  [MICROMOD_LOGO_.5]  45.47,177.04 0 bottom
U$324  [CHG0]  19.43,189.74 0 top
U$325  [#3#3V#0]  34.67,191.52 0 bottom
U$326  [#BYP#0]  25.4,179.45 0 bottom
U$327  [#MEAS#0]  30.23,165.86 0 bottom
U$328  QWIIC_BOARD_OUTLINESTANDOFF  [QWIIC_BOARD_MOUNT_SMD_STANDOFFS]  75.95,175.77 0 top
U$329  [3V30]  19.43,191.64 0 top
U$330  [#3#3V_EN#0]  29.46,174.5 0 bottom
U$331  [#GND#0]  39.12,187.45 90 top
U$332  [#GND#0]  39.12,187.45 90 bottom
U$333  [#CIPO#0]  49.28,186.94 90 top
U$334  [#CIPO#0]  49.28,186.94 90 bottom
U$335  [#COPI#0]  51.82,186.94 90 top
U$336  [#COPI#0]  51.82,186.94 90 bottom
U$337  [#SCK#0]  54.36,187.58 90 top
U$338  [#SCK#0]  54.36,187.58 90 bottom
U$339  [#VBAT#0]  21.08,177.67 0 bottom
U$340  [#GND#0]  19.81,175.13 0 bottom
U$341  [#0]  15.24,177.67 0 top
U$342  [#0]  21.46,185.8 0 top
U$343  [#0]  14.86,175.39 0 top
U$344  [#0]  21.08,181.48 0 top
U$345  [#D0#0]  44.2,188.47 90 top
U$346  [#D0#0]  44.2,188.47 90 bottom
U$347  [#D1#0]  46.74,188.72 90 top
U$348  [#D1#0]  46.74,188.72 90 bottom
U$349  [RESET0]  24.51,158.5 90 top
U$350  [BOOT0]  33.53,158.88 90 top
U$351  [22220]  40.89,163.83 0 top
U$352  [#3#3V#0]  36.58,187.07 90 top
U$353  [#3#3V#0]  36.58,187.07 90 bottom
U$354  [##CS##0]  56.9,188.47 90 top
U$355  [##CS##0]  56.9,188.47 90 bottom
U$356  [##INT##0]  41.66,187.83 90 top
U$357  [##INT##0]  41.66,187.83 90 bottom
U$358  QWIIC_BOARD_OUTLINESTANDOFF  [QWIIC_BOARD_MOUNT_SMD_STANDOFFS]  106.43,175.77 0 top
U$359  [QWIIC_CARRIER_#_2X10]  79.88,160.66 0 top
U$360  [QWIIC_CARRIER_#_2X10]  56.64,174.5 0 bottom
U$361  [SFE_LOGO_FLAME_.2]  141.48,188.59 0 top
U$362  [MICROMOD_LOGO_.5]  200.79,191.39 0 top
U$363  [MICROMOD_LOGO_.5]  155.19,177.04 0 bottom
U$364  [CHG0]  129.16,189.74 0 top
U$365  [#3#3V#0]  144.4,191.52 0 bottom
U$366  [#BYP#0]  135.13,179.45 0 bottom
U$367  [#MEAS#0]  139.95,165.86 0 bottom